# Altium PCB VAMoS PCB RevB.PcbDoc (part 1 of 3)
Units mm, origin at the board's own origin, x right, y up, seen from the top; angles counter-clockwise.
Board outline 96.93 x 94.75 mm, 4 copper layers (Top Signal Layer, Power Plane, Ground Plane, Bottom Signal Layer), stack 1.66 mm thick; 217 components, 103 nets, 623 pads, 255 vias.
Unrouted connection lines stored in the file: 51.
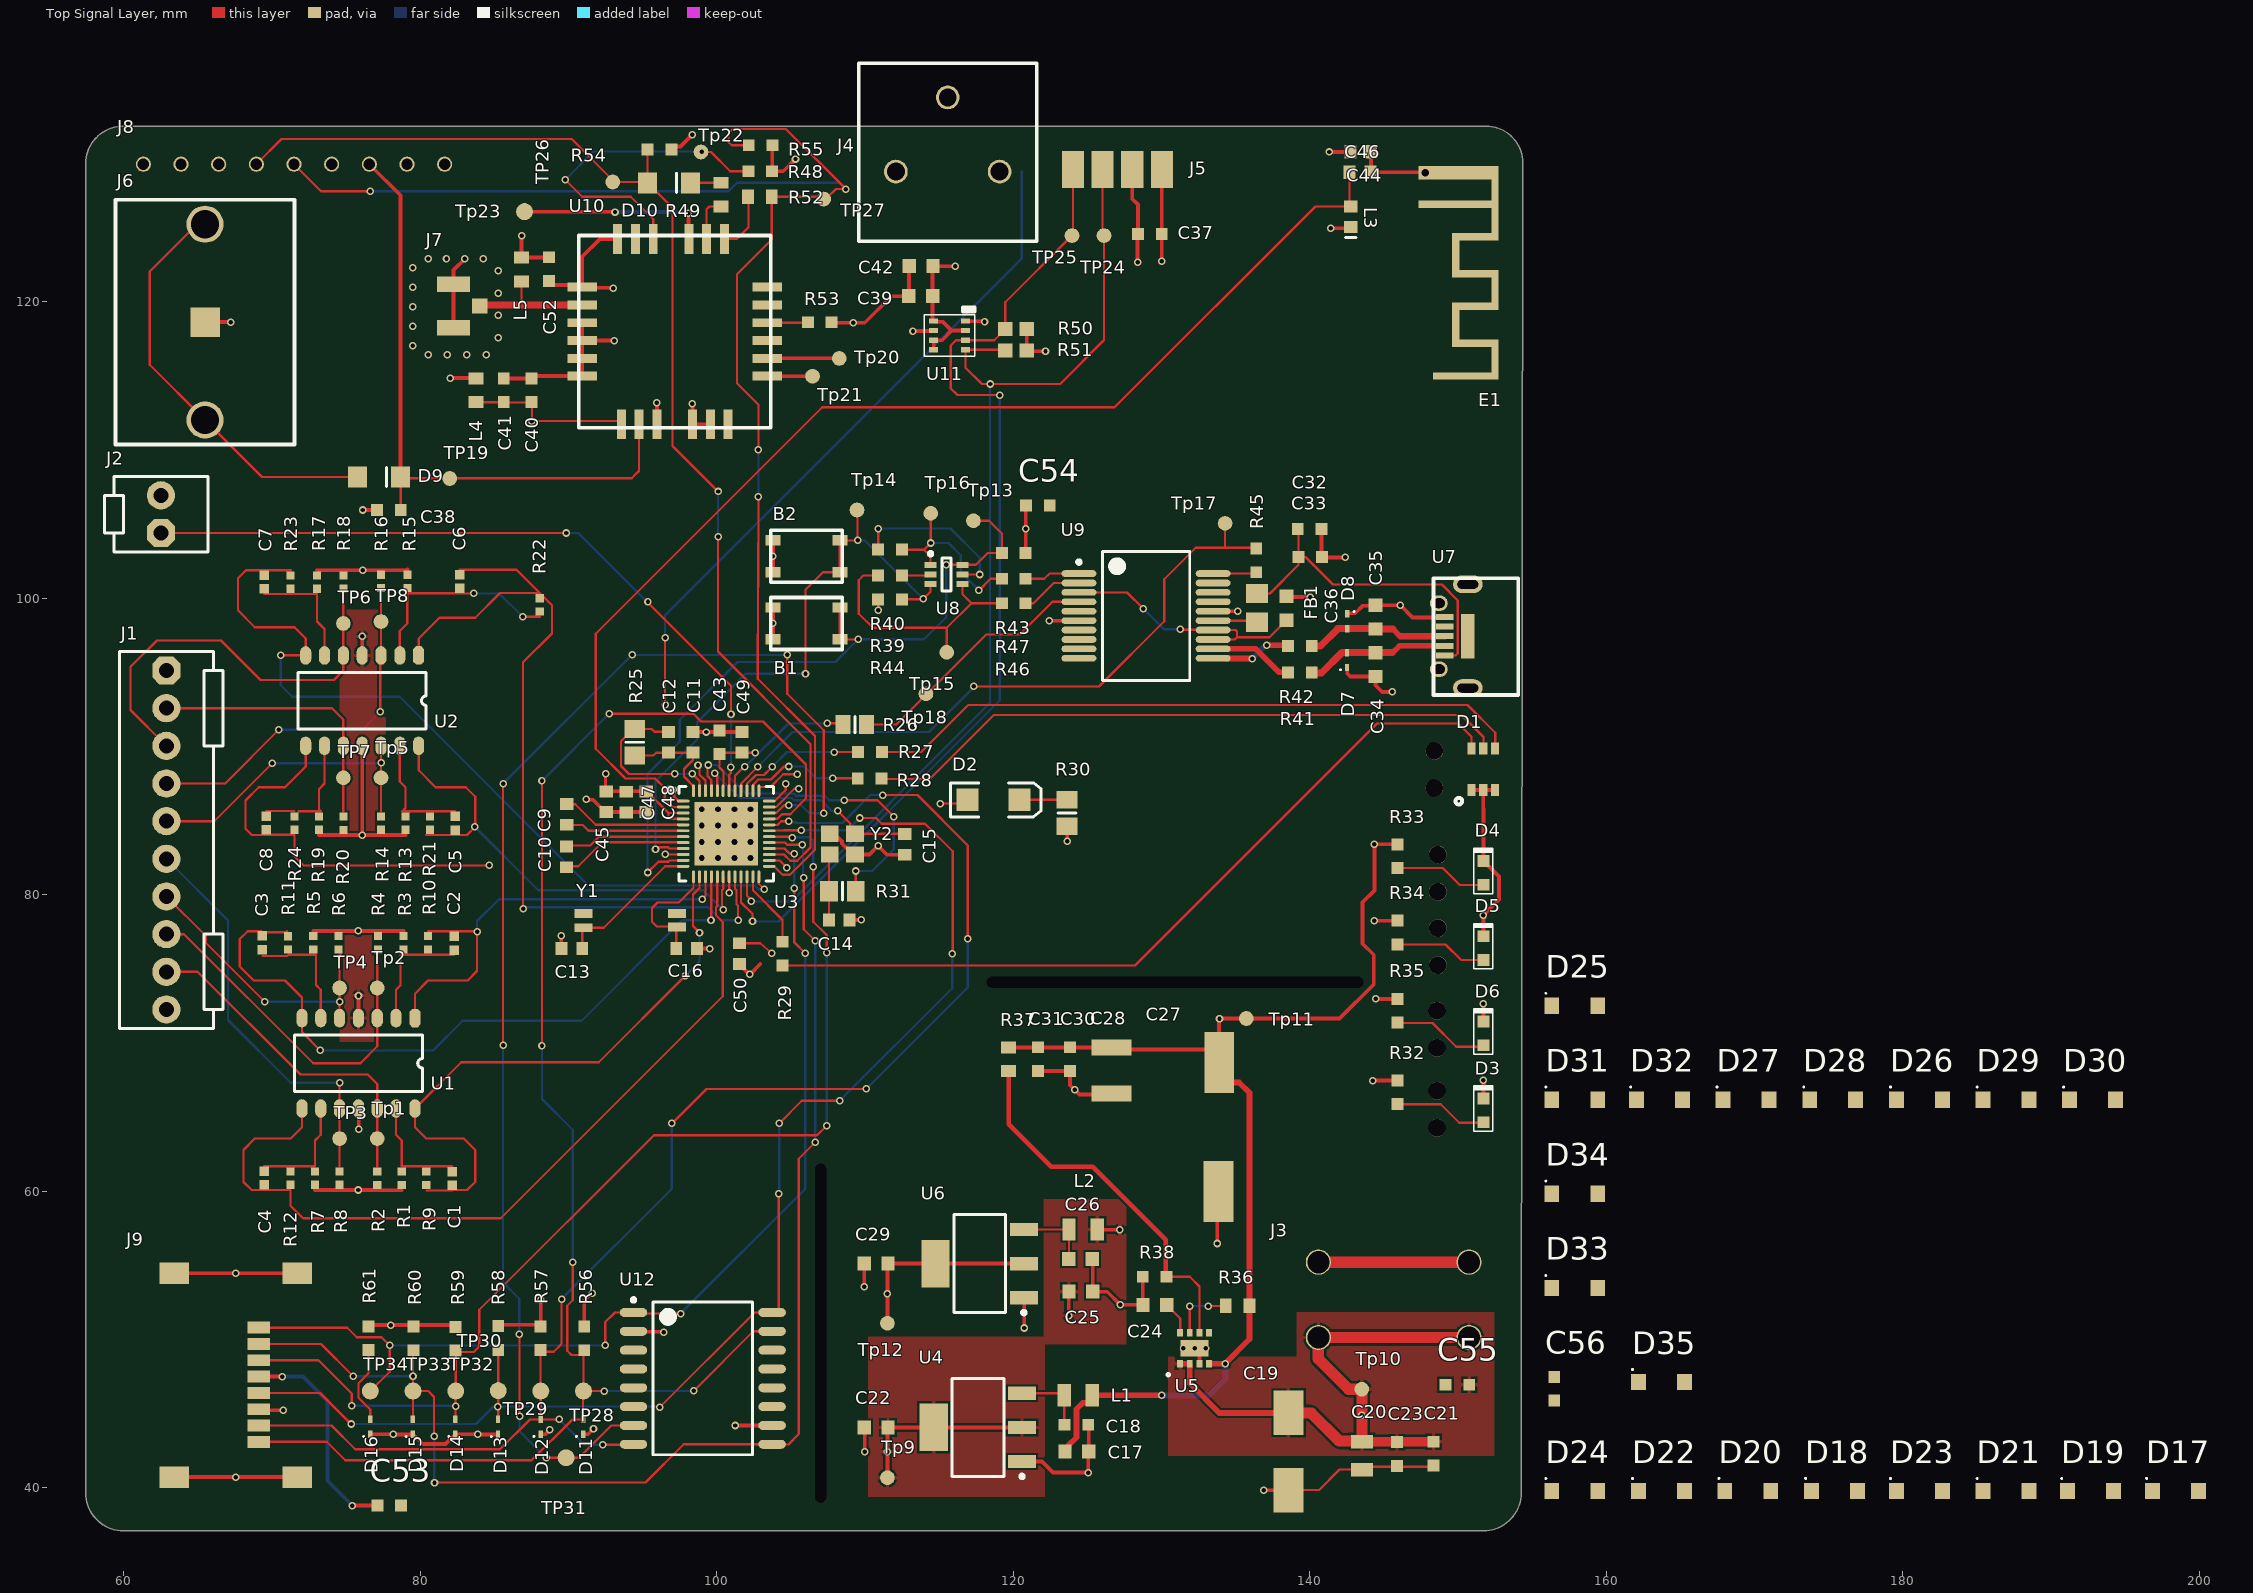
[diagram p0: Top Signal Layer view]
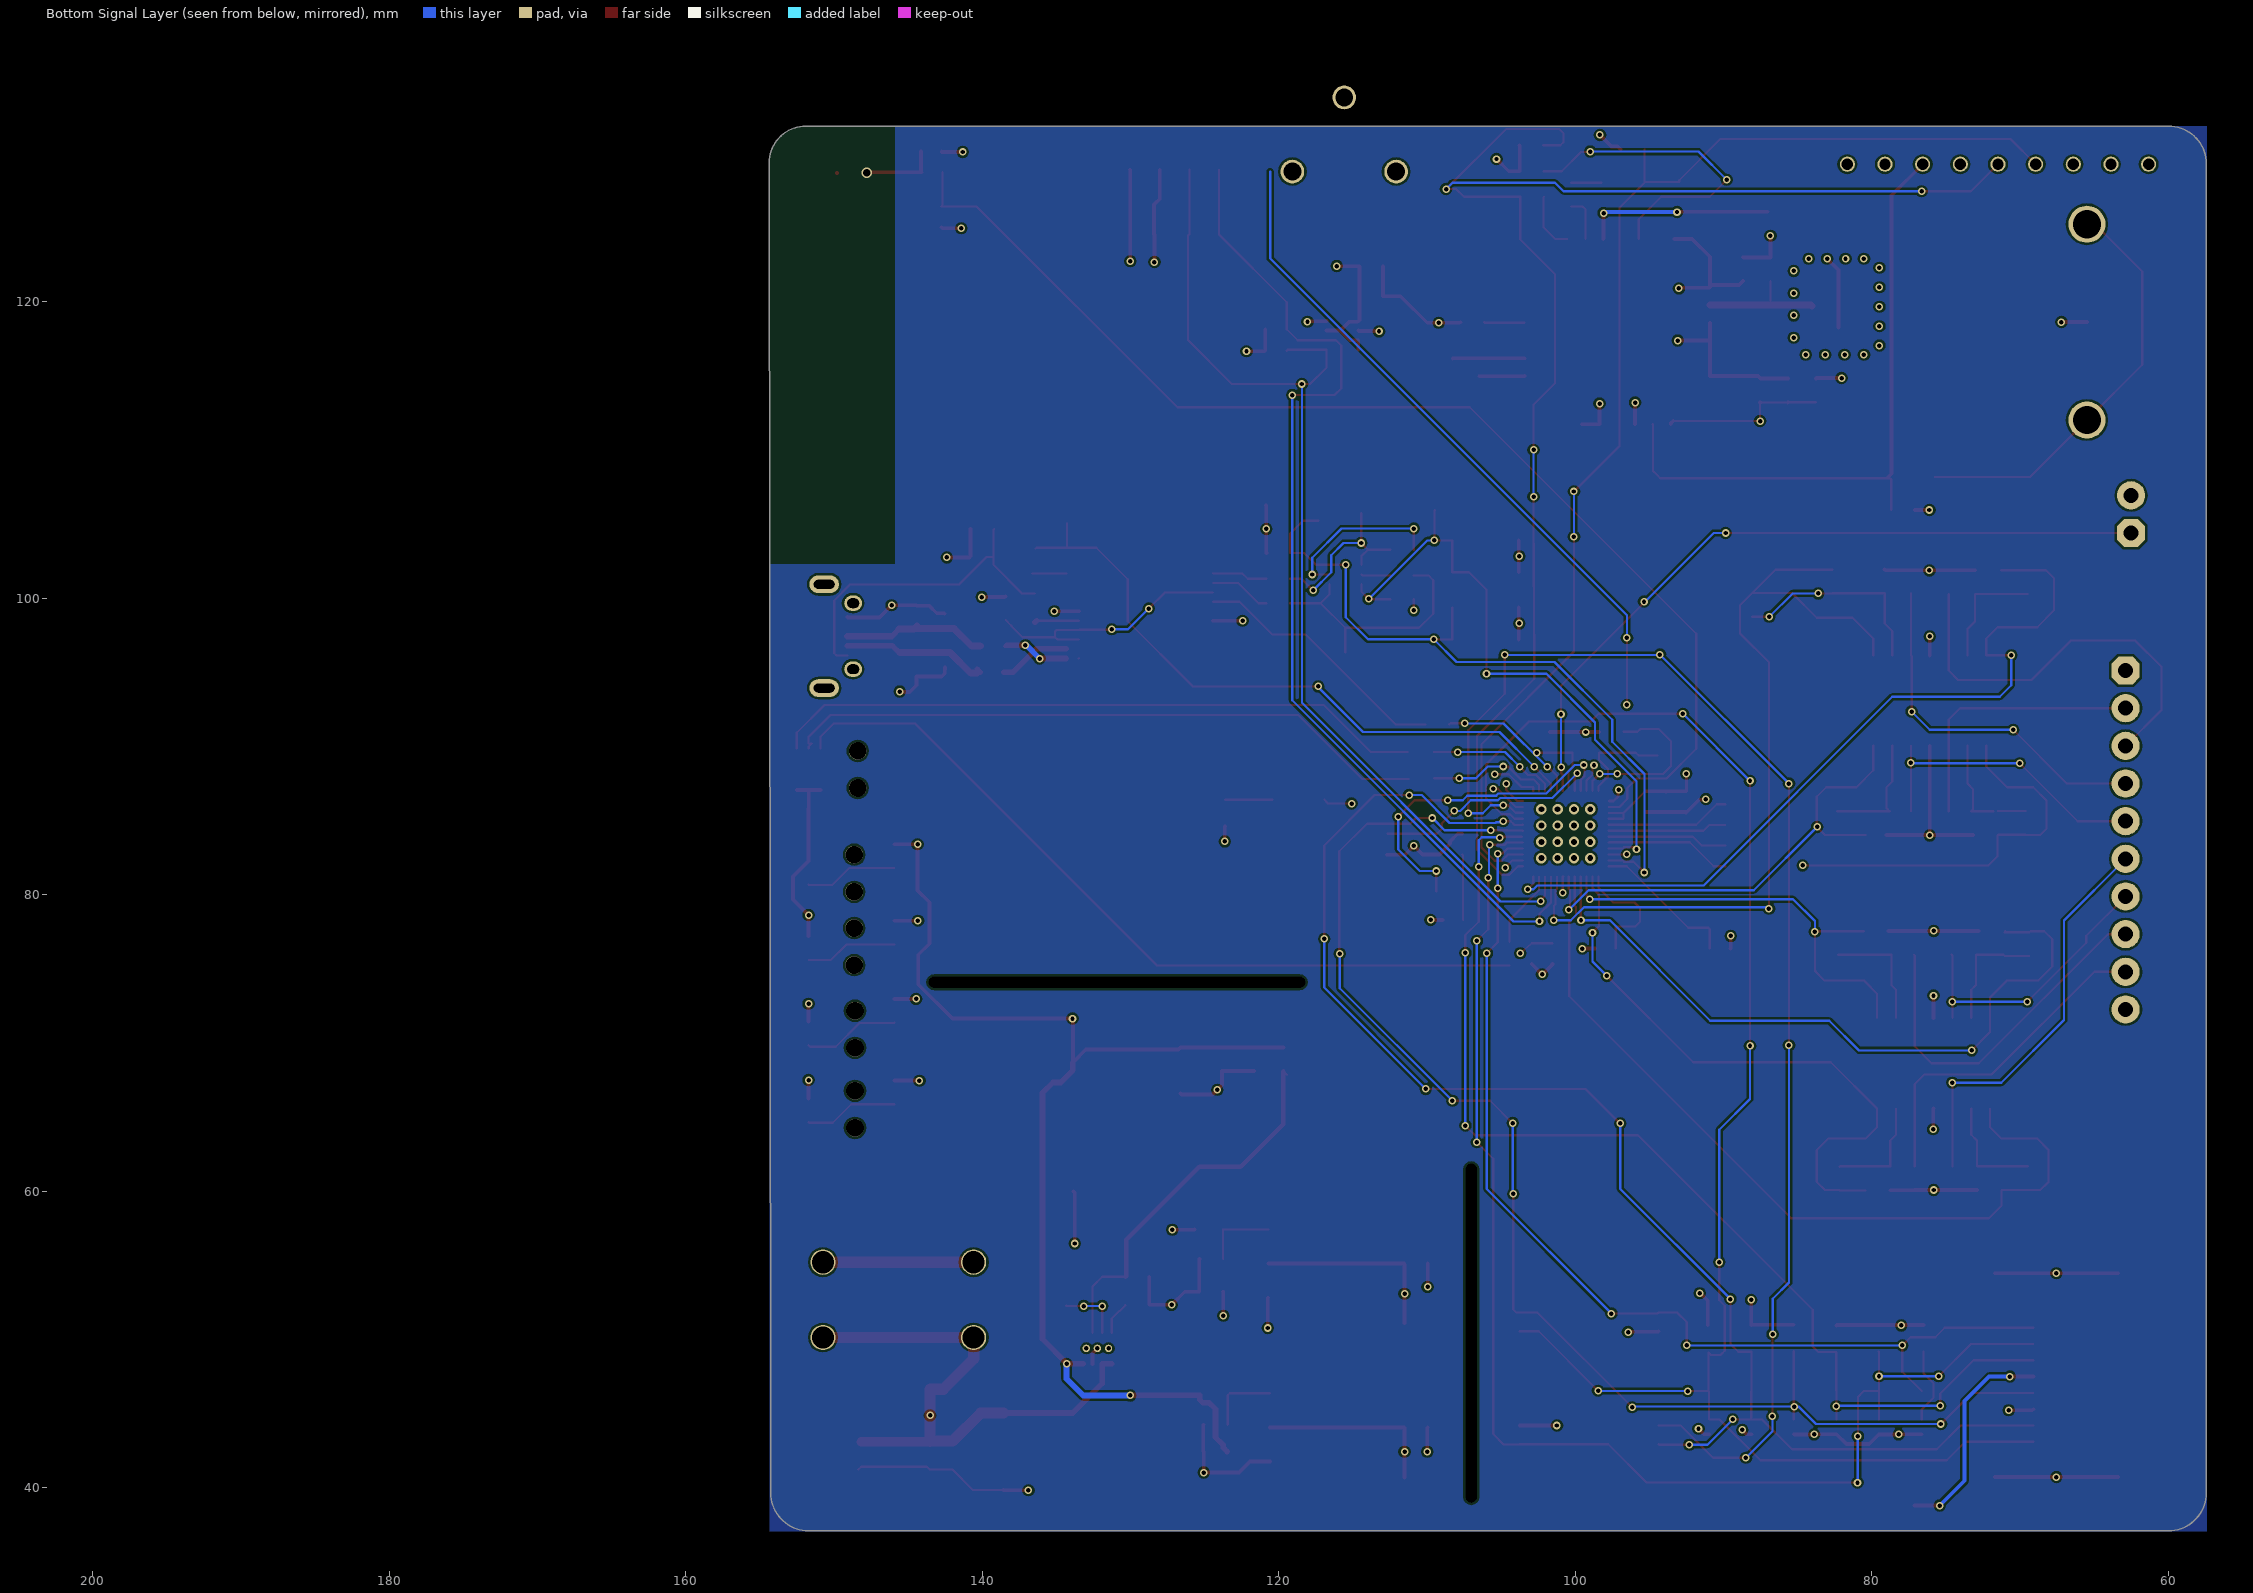
[diagram p1: Bottom Signal Layer view, seen from below]
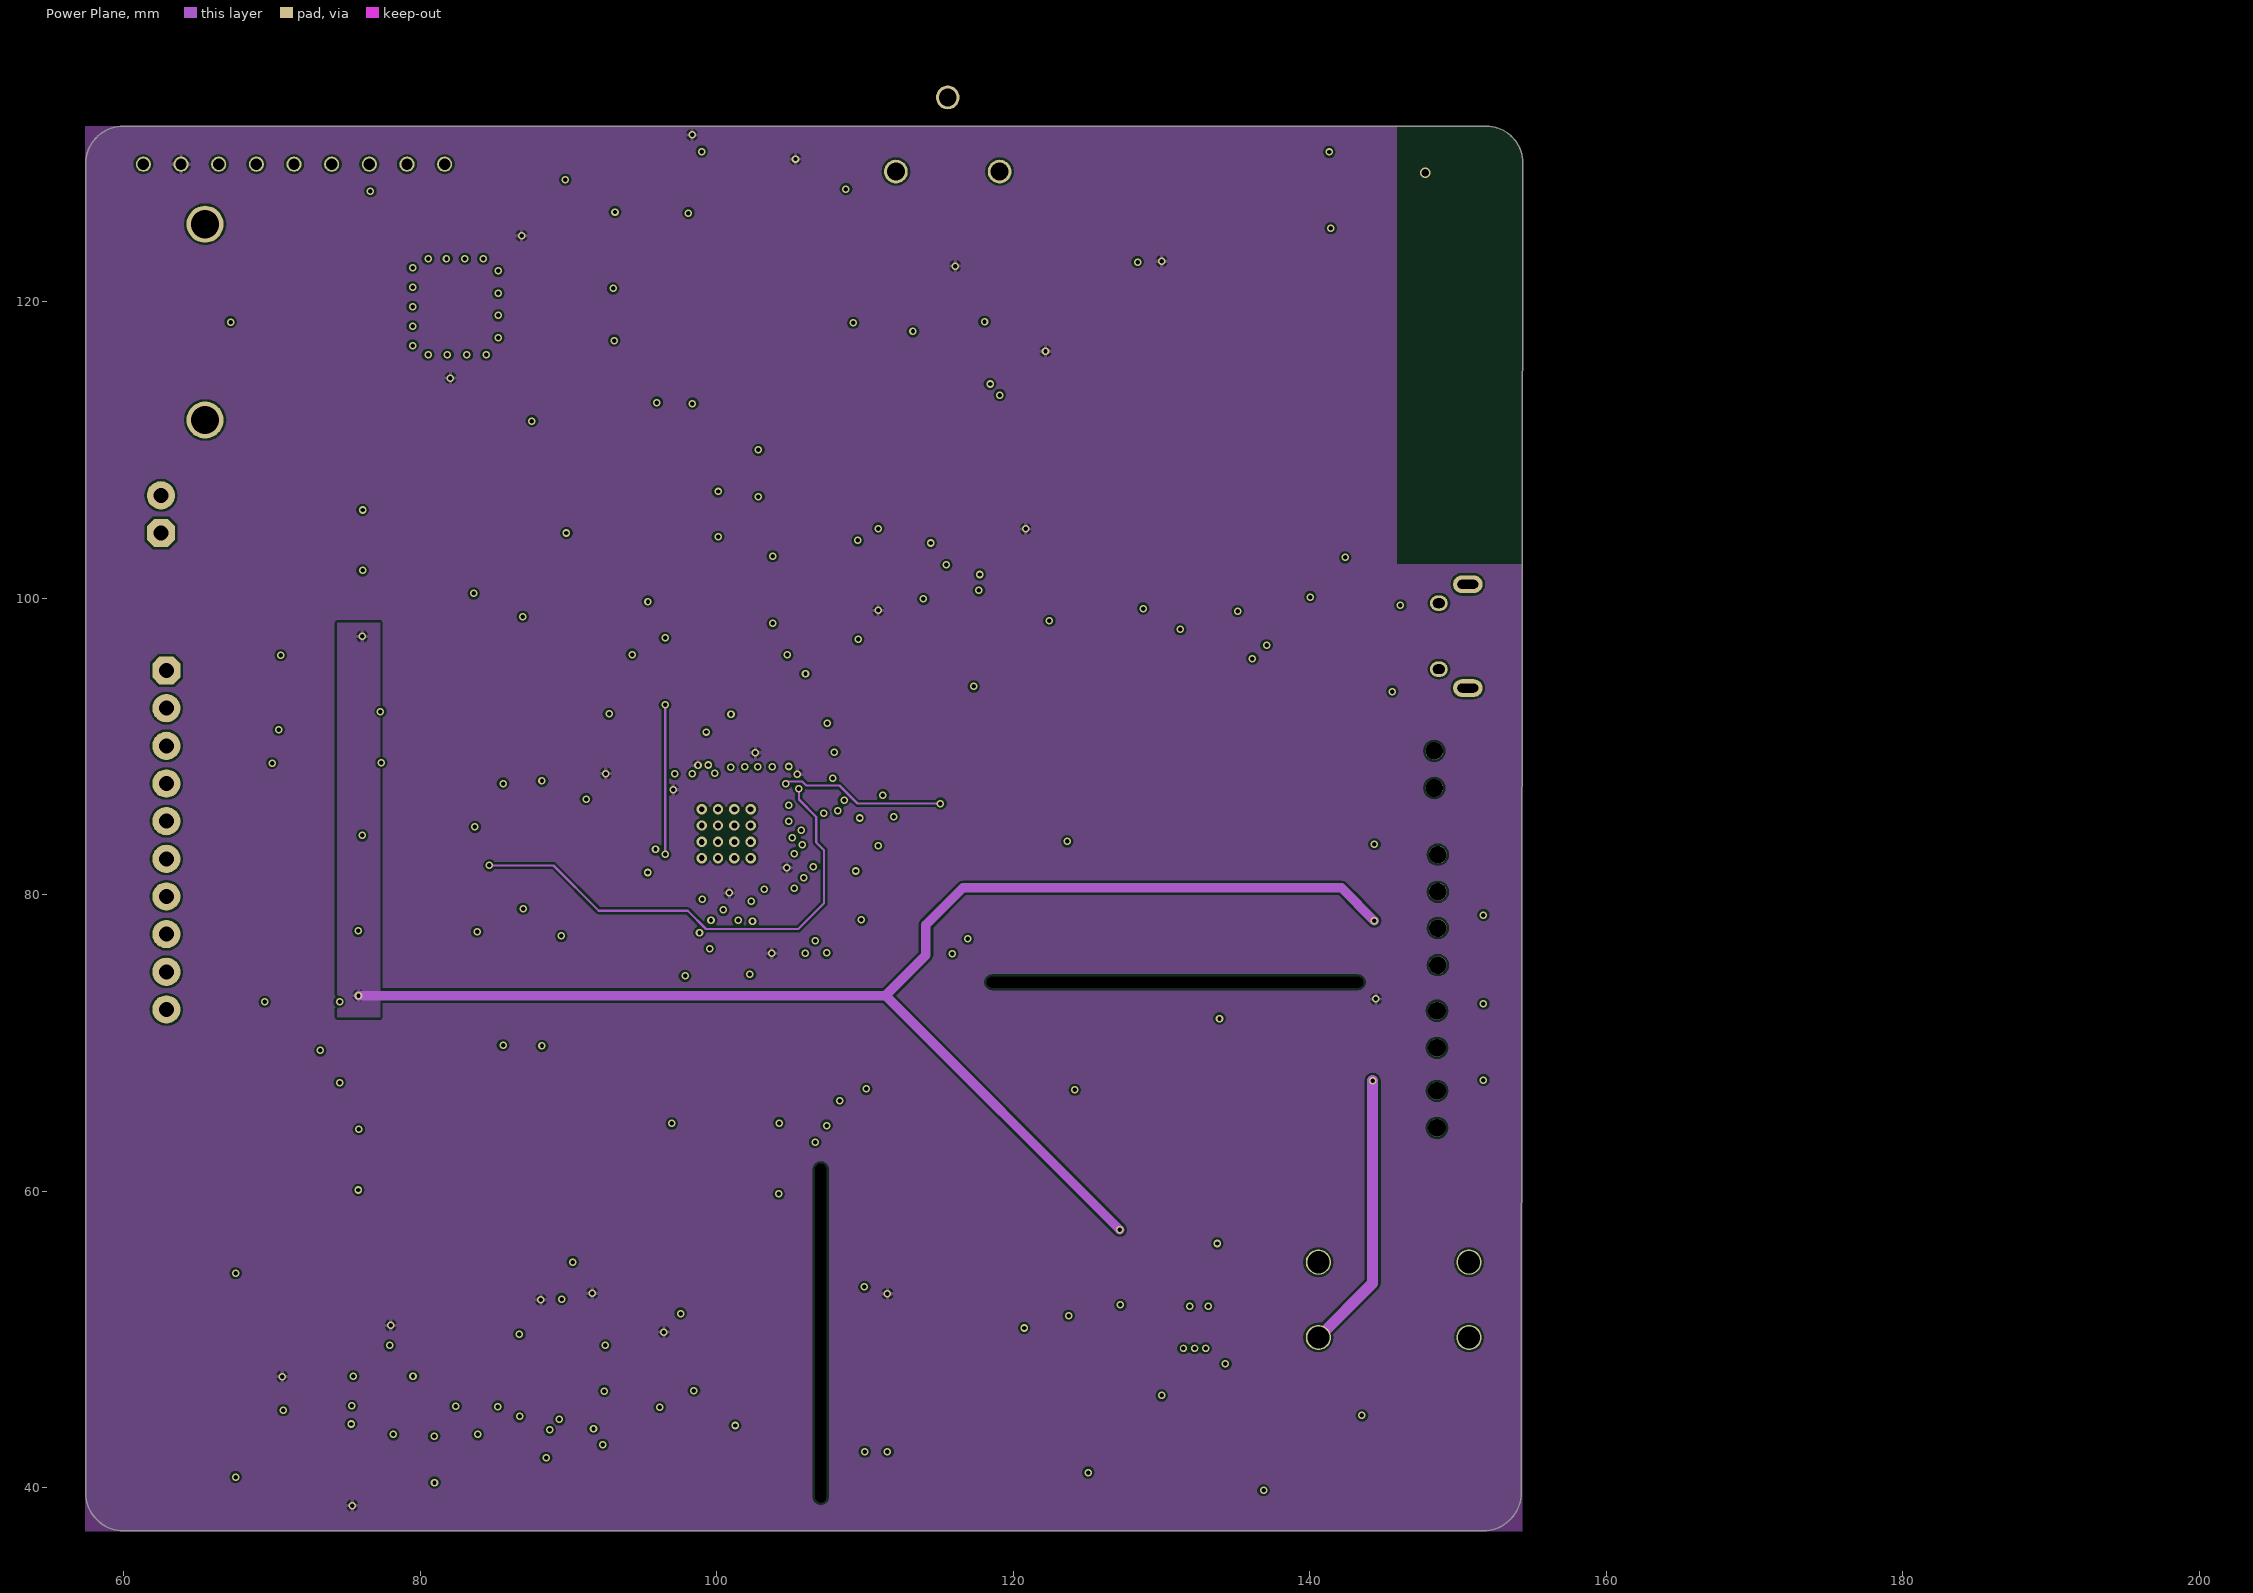
[diagram p2: Power Plane]
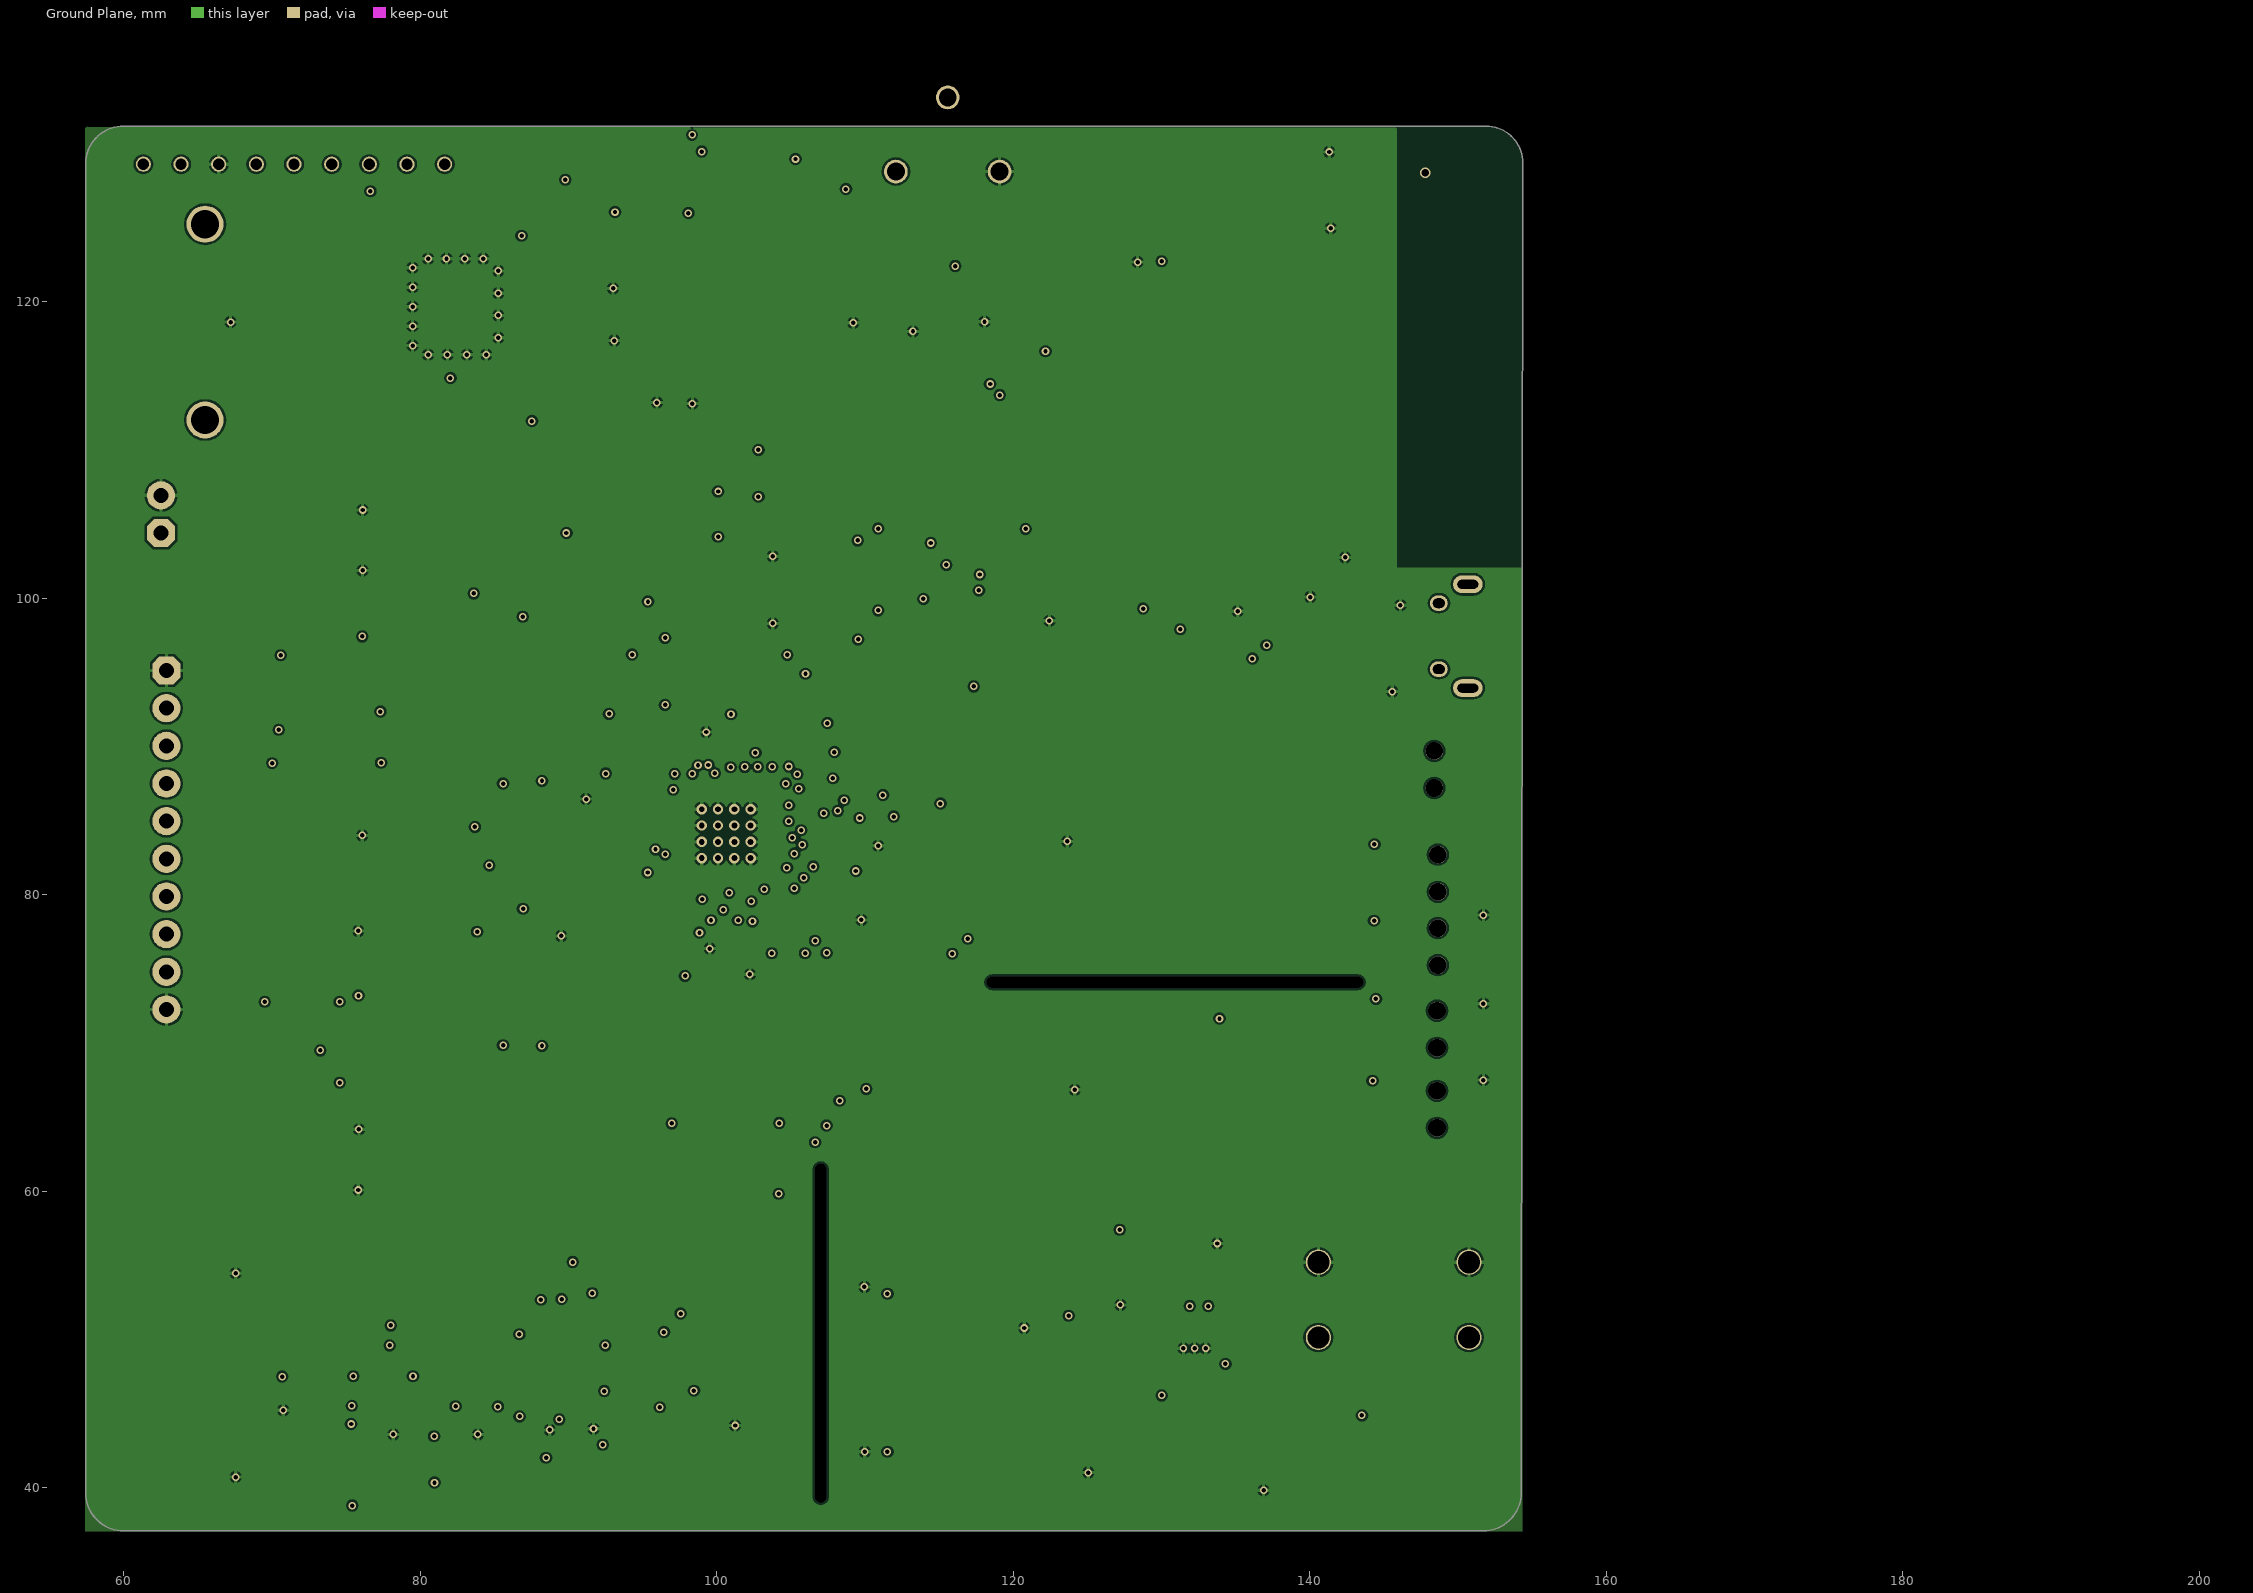
[diagram p3: Ground Plane]
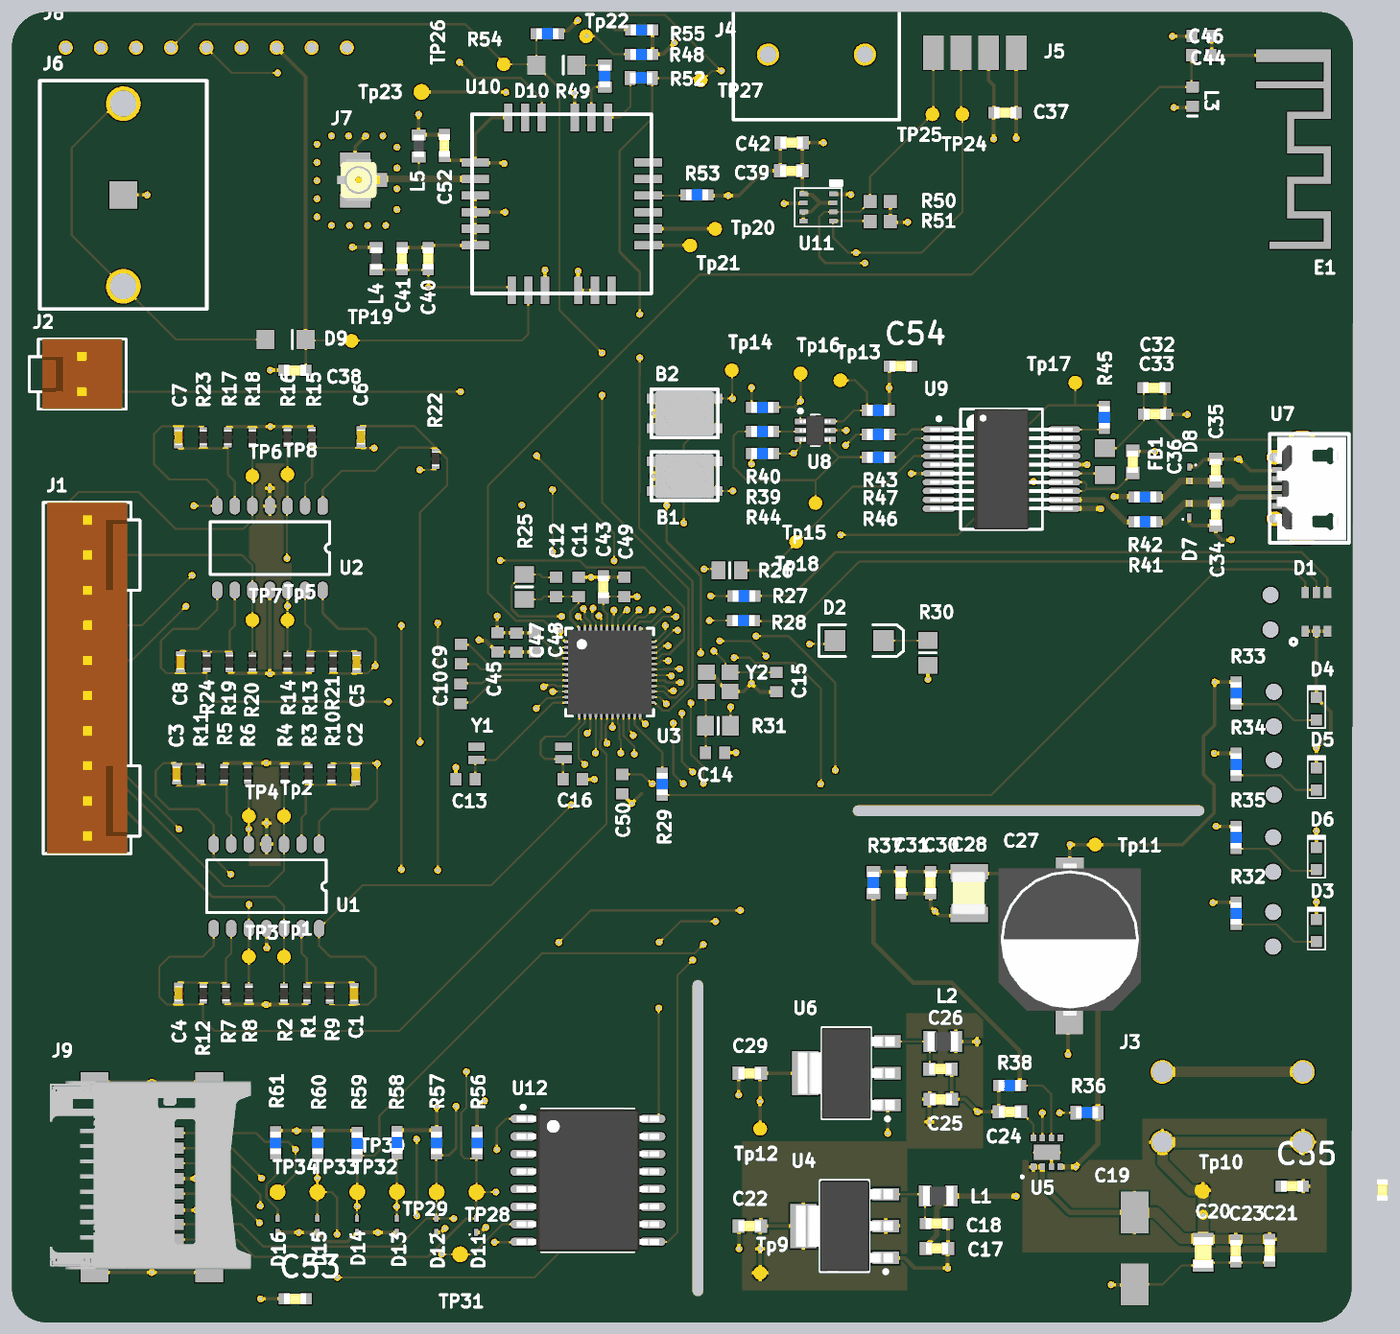
[diagram p5: 3D render of the assembled board from above, using the file's embedded part models]

## Layer stack, top to bottom
Top Solder: solder mask 0.0102, Solder Resist, Dk 3.5
Top Signal Layer: signal copper 0.035
Dielectric 1: prepreg 0.185, PP-006, Dk 4.2
Power Plane: signal copper 0.035
Dielectric 3: core 1.15, Core-009, Dk 4.2
Ground Plane: signal copper 0.035
Dielectric 2: prepreg 0.185, PP-006, Dk 4.2
Bottom Signal Layer: signal copper 0.035
Bottom Solder: solder mask 0.0102, Solder Resist, Dk 3.5

## Board outline
154.25,45.15 154.25,39.64 cw(c151.71,39.64) 151.71,37.1 59.965,37.1 cw(c59.965,39.64) 57.425,39.64 57.425,129.31 cw(c59.965,129.31) 59.965,131.85 151.875,131.85 cw(c151.875,129.375) 154.35,129.375

## Design rules (kind name [scope] priority, off if disabled: settings)
Clearance [All] p1: gap=0.15 ignorepadtopadclearanceinfootprint=FALSE except(0: Arc-Hole Track-Hole SMDPad-Hole THPad-Hole Via-Hole Fill-Hole Poly-Hole Region-Hole Text-Hole)
ComponentClearance [All] p1: gap=0.25 collisioncheckmode=3 verticalgap=0.25 showdistances=FALSE
DiffPairsRouting [All] p1: maxlimit=10 minlimit=0.2 mostfreqgap=0.25 toplayer_minwidth=0.2 toplayer_maxwidth=10 toplayer_prefwidth=0.25 midlayer1_minwidth=0.2 midlayer1_maxwidth=10 midlayer1_prefwidth=0.25 midlayer2_minwidth=0.2 midlayer2_maxwidth=10 midlayer2_prefwidth=0.25 bottomlayer_minwidth=0.2 bottomlayer_maxwidth=10 bottomlayer_prefwidth=0.25 maxuncoupledlength=12.7
Height [All] p1: minheight=0 maxheight=100 prefheight=0
HoleSize [All] p1: absolutevalues=TRUE maxlimit=12 minlimit=0.3 maxpercent=80.000 minpercent=20.000
HoleToHoleClearance [All] p1: gap=0.25 allowstackedmicrovias=TRUE
MinimumSolderMaskSliver [All] p1: minsoldermaskwidth=0.05
PlaneClearance [All] p1: clearance=0.5
PlaneConnect [All] p1: planeconnectstyle=Relief reliefexpansion=0.25 reliefentries=4 reliefconductorwidth=0.25 reliefairgap=0.25
PolygonConnect [All] p1: connectstyle=Relief reliefconductorwidth=0.25 reliefentries=4 polygonreliefangle="90 Angle" airgapwidth=0.15
RoutingCorners [All] p1: cornerstyle=45-Degree minsetback=2.5 maxsetback=2.5
RoutingVias [All] p1: holewidth=0.4 width=0.6 viastyle="Through Hole" minholewidth=0.3 minwidth=0.5 maxholewidth=1 maxwidth=1.5
SilkToSilkClearance [All] p1: silktosilkclearance=0.25
SilkToSolderMaskClearance [IsPad] p1: minsilkscreentomaskgap=0.1 clearancetoexposedcopper=TRUE
SolderMaskExpansion [All] p1: expansion=0.1
Width [All] p1: maxlimit=10 minlimit=0.15 preferedwidth=0.25 minimp=50.000000 maximp=50.000000 favimp=50.000000
19 further rules are at their usual default settings.

## Classes and differential pairs
component class "MCU Auxiliary": C43 C44 C45 C46 C47 C48 C49 C50 C53 C54 C56 D11 D12 D13 D14 D15 D16 D35 E1 J9 L3 R56 R57 R58 R59 R60 R61 TP28 TP29 TP30 TP31 TP32 TP33 TP34 U12
differential pair DIFF90: +DIFF90_P -DIFF90_N

## Components (designator, comment, footprint, x,y, rotation, side; value= is the part's Value field where it differs from the comment)
B1 "Button C&K PTS815 SJG 250 SMTR LFS" "PTS 815" 106.042,98.298 r0 top
B2 "Button C&K PTS815 SJG 250 SMTR LFS" "PTS 815" 106.042,102.825 r0 top
C1 "100nF" CAPC1005X06N 82.15,60.87 r270 top
C2 "100nF" CAPC1005X06N 82.275,76.725 r90 top
C3 "100nF" CAPC1005X06N 69.325,76.763 r90 top
C4 "100nF" CAPC1005X06N 69.469,60.883 r270 top
C5 "100nF" CAPC1005X06N 82.35,84.825 r270 top
C6 "100nF" CAPC1005X06N 82.65,101.125 r90 top
C7 "100nF" CAPC1005X06N 69.469,101.092 r90 top
C8 "100nF" CAPC1005X06N 69.6,84.85 r270 top
C9 "Cap" 1608[0603] 89.875,85.425 r270 top value=270pF
C10 "Cap" 1608[0603] 89.85,82.55 r90 top value=270pF
C11 "Cap" 1608[0603] 98.39,90.285 r270 top value=10n
C12 "Cap" 1608[0603] 96.739,90.285 r270 top value=3n3
C13 "Cap" 1608[0603] 90.212,76.369 r0 top value=18pF
C14 "Cap" 1608[0603] 108.25,78.3 r0 top value=20pF
C15 "Cap" 1608[0603] 112.68,83.393 r270 top value=20pF
C16 "Cap" 1608[0603] 97.959,76.369 r180 top value=18pF
C17 "4.7uF" C1608[0603] 124.275,42.45 r180 top
C18 "4.7uF" "C1608[0603] small" 124.25,44.25 r180 top
C19 "22uF" "Radial Can F61 6.6x6.6" 138.557,42.545 r180 top
C20 "22uF" C2012[0805] 143.51,42.164 r90 top
C21 "100nF" "C1608[0603] small" 148.325,42.3 r90 top
C22 "4.7uF" C1608[0603] 110.744,44.069 r0 top
C23 "15nF" "C1608[0603] small" 145.875,42.275 r90 top
C24 "3.3nF" C1608[0603] 129.54,52.324 r0 top
C25 "4.7uF" C1608[0603] 124.55,53.225 r180 top value=4u7
C26 "4.7uF" C1608[0603] 124.525,55.425 r180 top value=4u7
C27 "100uF 50V Hybrid Polymer Bulk Smoothing" "Radial Can Size G" 133.854,64.337 r180 top
C28 "100uF" C3225[1210]_Tall 126.615,68.147 r90 top
C29 "4.7uF" C1608[0603] 110.744,55.118 r0 top value=4u7
C30 "100nF" "C1608[0603] small" 123.821,68.909 r90 top
C31 "15nF" "C1608[0603] small" 121.662,68.909 r90 top
C32 "4.7uF" "C1608[0603] small" 139.975,104.675 r180 top
C33 "100nF" "C1608[0603] small" 140.025,102.775 r180 top
C34 "47pF" C1608[0603] 144.425,95.525 r90 top
C35 "47pF" C1608[0603] 144.425,98.725 r270 top
C36 "100pF" C1608[0603] 138.425,99.325 r270 top
C37 "1uF" "C1608[0603] small" 129.2,124.575 r0 top
C38 "1uF" "C1608[0603] small" 77.875,105.95 r0 top
C39 "100pF" C1608[0603] 113.75,120.375 r0 top
C40 "1uF" "C1608[0603] small" 87.5,114.025 r270 top
C41 "100nF" "C1608[0603] small" 85.625,114.025 r270 top
C42 "100pF" C1608[0603] 113.775,122.4 r0 top
C43 "100nF" "C1608[0603] small" 100.168,90.285 r270 top
C44 "Cap" 1608[0603] 143.425,130.125 r180 top value=2.4pF
C45 "Cap" 1608[0603] 92.525,86.275 r90 top value=100n
C46 "Cap" 1608[0603] 143.375,128.725 r0 top value=5.6pF
C47 "Cap" 1608[0603] 93.875,86.25 r90 top value=100n
C48 "Cap" 1608[0603] 95.225,86.275 r90 top value=10u
C49 "Cap" 1608[0603] 101.692,90.285 r270 top value=100n
C50 "Cap" 1608[0603] 101.524,76.026 r90 top value=100n
C52 "1uF" "C1608[0603] small" 88.675,122.2 r90 top
C53 "100nF" "C1608[0603] small" 77.9,38.8 r180 top value=100n
C54 "100nF" "C1608[0603] small" 121.65,106.25 r180 top value=100n
C55 "1uF" "C1608[0603] small" 149.95,46.95 r0 top
C56 "100nF" "C1608[0603] small" 156.483,46.677 r90 top
D1 "VLMRGB6112" VLMRGB6112 151.692,88.47 r270 top
D2 "LED2" 3.2X1.6X1.1 118.66,86.402 r0 top
D3 "LED Green" LED_0603 151.7,65.45 r90 top
D4 "LED Green" LED_0603 151.7,81.475 r90 top
D5 "LED Green" LED_0603 151.7,76.4 r90 top
D6 "LED Green" LED_0603 151.7,70.65 r90 top
D7 "ESD7951ST5GOSCT-ND" SODFL100X40-2N 142.5,95.825 r90 top
D8 "ESD7951ST5GOSCT-ND" SODFL100X40-2N 142.525,98.45 r270 top
D9 "1N4148W-FDICT-ND" SOD-123FL_TVS 77.2,108.175 r0 top
D10 "1N4148W-FDICT-ND" SOD-123FL_TVS 96.774,128.016 r0 top
D11 "ESD7951ST5GOSCT-ND" SODFL100X40-2N 90.975,44.111 r90 top
D12 "ESD7951ST5GOSCT-ND" SODFL100X40-2N 88.105,44.111 r90 top
D13 "ESD7951ST5GOSCT-ND" SODFL100X40-2N 85.234,44.111 r90 top
D14 "ESD7951ST5GOSCT-ND" SODFL100X40-2N 82.364,44.111 r90 top
D15 "ESD7951ST5GOSCT-ND" SODFL100X40-2N 79.493,44.111 r90 top
D16 "ESD7951ST5GOSCT-ND" SODFL100X40-2N 76.623,44.111 r90 top
D17 "5V TVS" "NXP PTVSxS1UR-Series (SOD123W)" 198.385,39.777 r0 top
D18 "5V TVS" "NXP PTVSxS1UR-Series (SOD123W)" 175.384,39.777 r0 top
D19 "5V TVS" "NXP PTVSxS1UR-Series (SOD123W)" 192.659,39.777 r0 top
D20 "5V TVS" "NXP PTVSxS1UR-Series (SOD123W)" 169.533,39.777 r0 top
D21 "5V TVS" "NXP PTVSxS1UR-Series (SOD123W)" 186.959,39.777 r0 top
D22 "5V TVS" "NXP PTVSxS1UR-Series (SOD123W)" 163.708,39.777 r0 top
D23 "5V TVS" "NXP PTVSxS1UR-Series (SOD123W)" 181.109,39.777 r0 top
D24 "5V TVS" "NXP PTVSxS1UR-Series (SOD123W)" 157.858,39.777 r0 top
D25 "5V TVS" "NXP PTVSxS1UR-Series (SOD123W)" 157.858,72.504 r0 top
D26 "3.3V TVS" "NXP PTVSxS1UR-Series (SOD123W)" 181.109,66.178 r0 top
D27 "3.3V TVS" "NXP PTVSxS1UR-Series (SOD123W)" 169.408,66.178 r0 top
D28 "3.3V TVS" "NXP PTVSxS1UR-Series (SOD123W)" 175.259,66.178 r0 top
D29 "3.3V TVS" "NXP PTVSxS1UR-Series (SOD123W)" 186.959,66.178 r0 top
D30 "3.3V TVS" "NXP PTVSxS1UR-Series (SOD123W)" 192.784,66.178 r0 top
D31 "3.3V TVS" "NXP PTVSxS1UR-Series (SOD123W)" 157.858,66.178 r0 top
D32 "3.3V TVS" "NXP PTVSxS1UR-Series (SOD123W)" 163.583,66.178 r0 top
D33 "3.3V TVS" "NXP PTVSxS1UR-Series (SOD123W)" 157.858,53.478 r0 top
D34 "12V TVS" "NXP PTVSxS1UR-Series (SOD123W)" 157.858,59.828 r0 top
D35 "3.3V TVS" "NXP PTVSxS1UR-Series (SOD123W)" 163.708,47.127 r0 top
E1 "Antenna" SWRA1117 149.783,128.688 r270 top
FB1 "Ferrite Bead" MI0805K400R-10 136.425,100.325 r180 top
J1 "Analog Inputs" 6410/10pin 62.865,95.123 r270 top
J2 "To Pump" 6410/2pin 62.5,104.4 r90 top
J3 "1790283" "5.08mm 2pos TermBlock" 145.65,52.675 r270 top
J4 "1985205" "3POS PHOENIX" 115.57,128.778 r0 top
J5 "Four Terminal Small" "Solder Small 4 Pos" 127.016,128.905 r180 top
J6 "Keystone 2997" "2997 11.6MM COIN CELL" 65.475,118.625 r90 top
J7 "uFL Connector" CONUFL001-SMD-T 82.481,119.711 r90 top
J8 "PPPC091LFBN-RC" "0.100\" 9PIN" 71.475,129.275 r180 top
J9 "472192001" SD-47219-001 69.088,47.498 r90 top
L1 "MH2029" L2012[0805] 124.372,46.244 r180 top
L2 "MH2029" L2012[0805] 124.702,57.416 r180 top
L3 "Inductor" INDC1608L 142.748,125.73 r90 top value=2.7nH
L4 "600Ohm @ 100MHz" L1608[0603] 83.75,114.025 r270 top
L5 "33nH" L1608[0603] 86.825,122.175 r90 top
R1 "1K0" RESC1005X03N 78.74,60.87 r90 top value=1k
R2 "4R99" RESC1005X03N 77.089,60.87 r90 top
R3 "1K0" RESC1005X03N 78.867,76.758 r270 top value=1k
R4 "4R99" RESC1005X03N 77.141,76.758 r270 top
R5 "1K0" RESC1005X03N 72.771,76.758 r270 top value=1k
R6 "4R99" RESC1005X03N 74.474,76.758 r270 top
R7 "1K0" RESC1005X03N 72.898,60.883 r90 top value=1k
R8 "4R99" RESC1005X03N 74.549,60.883 r90 top
R9 "22K" RESC1005X03N 80.391,60.87 r270 top
R10 "22K" RESC1005X03N 80.518,76.758 r90 top
R11 "22K" RESC1005X03N 71.075,76.75 r90 top
R12 "22K" RESC1005X03N 71.247,60.883 r270 top
R13 "1K0" RESC1005X03N 78.994,84.836 r90 top value=1k
R14 "4R99" RESC1005X03N 77.343,84.836 r90 top
R15 "1K0" RESC1005X03N 79.121,101.13 r270 top value=1k
R16 "4R99" RESC1005X03N 77.343,101.13 r270 top
R17 "1K0" RESC1005X03N 73.025,101.092 r270 top value=1k
R18 "4R99" RESC1005X03N 74.803,101.092 r270 top
R19 "1K0" RESC1005X03N 73.152,84.836 r90 top value=1k
R20 "4R99" RESC1005X03N 74.803,84.823 r90 top
R21 "22K" RESC1005X03N 80.645,84.836 r270 top
R22 "22K" RESC1005X03N 88.05,99.55 r90 top
R23 "22K" RESC1005X03N 71.247,101.092 r90 top
R24 "22K" RESC1005X03N 71.501,84.836 r270 top
R25 "20K" 6-0805_N 94.453,90.285 r90 top
R26 "499R" 6-0805_L 109.3,91.475 r0 top
R27 "165R" "R1608[0603] small" 110.325,89.625 r0 top
R28 "165R" "R1608[0603] small" 110.3,87.85 r0 top
R29 "165R" "R1608[0603] small" 104.425,76.025 r270 top
R30 "330R" 6-0805_N 123.613,85.513 r90 top
R31 "0R" 6-0805_N 108.461,80.241 r180 top
R32 "1.2K" "R1608[0603] small" 145.9,66.675 r90 top
R33 "560" "R1608[0603] small" 145.9,82.6 r90 top
R34 "560" "R1608[0603] small" 145.9,77.45 r90 top
R35 "330" "R1608[0603] small" 145.9,72.175 r90 top
R36 "100K" R1608[0603] 135.125,52.275 r0 top
R37 "71K5" R1608[0603] 119.675,68.9 r90 top
R38 "10K" "R1608[0603] small" 129.527,54.229 r0 top
R39 "1K0" "R1608[0603] small" 111.675,101.525 r0 top
R40 "1K0" "R1608[0603] small" 111.675,103.275 r0 top
R41 "27R" "R1608[0603] small" 139.319,94.996 r0 top
R42 "27R" "R1608[0603] small" 139.319,96.774 r0 top
R43 "10K" "R1608[0603] small" 120.022,103.05 r0 top
R44 "10K" "R1608[0603] small" 111.675,99.925 r180 top
R45 "1K0" "R1608[0603] small" 136.375,102.55 r270 top
R46 "1K0" "R1608[0603] small" 120.022,99.659 r0 top
R47 "1K0" "R1608[0603] small" 120.022,101.31 r0 top
R48 "10K" "R1608[0603] small" 102.925,128.8 r0 top
R49 "470" R1608[0603] 100.275,127.225 r90 top
R50 "4.7K Resistor 0603" "0603 Resistor" 120.175,118.15 r0 top value=4k7
R51 "4.7K Resistor 0603" "0603 Resistor" 120.174,116.701 r0 top value=4k7
R52 "470" R1608[0603] 102.9,127.075 r0 top
R53 "10K" "R1608[0603] small" 106.934,118.618 r180 top
R54 "10K" "R1608[0603] small" 96.125,130.275 r0 top
R55 "10K" "R1608[0603] small" 102.95,130.55 r0 top
R56 "10K" "R1608[0603] small" 91.05,50.075 r90 top value=10k
R57 "10K" "R1608[0603] small" 88.1,50.08 r90 top value=10k
R58 "10K" "R1608[0603] small" 85.25,50.1 r90 top value=10k
R59 "10K" "R1608[0603] small" 82.375,50.05 r90 top value=10k
R60 "10K" "R1608[0603] small" 79.525,50.075 r90 top value=10k
R61 "10K" "R1608[0603] small" 76.496,50.08 r90 top value=10k
Tp1 "PAD" TP_SMD_39MIL 77.089,63.55 r0 top (schematic designator TP1)
Tp2 "PAD" TP_SMD_39MIL 77.089,73.71 r0 top (schematic designator TP2)
TP3 "PAD" TP_SMD_39MIL 74.549,63.55 r0 top
TP4 "PAD" TP_SMD_39MIL 74.549,73.71 r0 top
Tp5 "PAD" TP_SMD_39MIL 77.343,87.884 r0 top (schematic designator TP5)
TP6 "PAD" TP_SMD_39MIL 74.803,98.298 r0 top
TP7 "PAD" TP_SMD_39MIL 74.803,87.884 r0 top
TP8 "PAD" TP_SMD_39MIL 77.343,98.425 r0 top
Tp9 "PAD" TP_SMD_39MIL 111.5,40.675 r270 top (schematic designator TP9)
Tp10 "PAD" TP_SMD_39MIL 143.5,46.65 r180 top (schematic designator TP10)
Tp11 "PAD" TP_SMD_39MIL 135.708,71.65 r180 top (schematic designator TP11)
Tp12 "PAD" TP_SMD_39MIL 111.5,51.1 r270 top (schematic designator TP12)
Tp13 "PAD" TP_SMD_39MIL 117.3,105.225 r90 top (schematic designator TP13)
Tp14 "PAD" TP_SMD_39MIL 109.45,105.95 r90 top (schematic designator TP14)
Tp15 "PAD" TP_SMD_39MIL 115.5,96.35 r90 top (schematic designator TP15)
Tp16 "PAD" TP_SMD_39MIL 114.425,105.725 r90 top (schematic designator TP16)
Tp17 "PAD" TP_SMD_39MIL 134.275,105.05 r90 top (schematic designator TP17)
Tp18 "PAD" TP_SMD_39MIL 114.1,93.55 r90 top (schematic designator TP18)
TP19 "PAD" TP_SMD_39MIL 81.975,108.075 r90 top
Tp20 "PAD" TP_SMD_39MIL 108.25,116.175 r90 top
Tp21 "PAD" TP_SMD_39MIL 106.45,114.975 r90 top
Tp22 "PAD" TP_SMD_39MIL 98.925,130.1 r90 top
Tp23 "PAD" TP_SMD_45MIL 87.025,126.075 r90 top
TP24 "PAD" TP_SMD_39MIL 126.111,124.46 r90 top
TP25 "PAD" TP_SMD_39MIL 123.952,124.46 r90 top
TP26 "PAD" TP_SMD_39MIL 92.975,128.075 r90 top
TP27 "PAD" TP_SMD_39MIL 107.2,126.925 r90 top
TP28 "PAD" TP_SMD_45MIL 91,46.524 r90 top locked
TP29 "PAD" TP_SMD_45MIL 88.12,46.524 r90 top locked
TP30 "PAD" TP_SMD_45MIL 85.25,46.55 r90 top
TP31 "PAD" TP_SMD_45MIL 89.825,42.025 r90 top
TP32 "PAD" TP_SMD_45MIL 82.385,46.524 r90 top locked
TP33 "PAD" TP_SMD_45MIL 79.503,46.524 r90 top locked
TP34 "PAD" TP_SMD_45MIL 76.623,46.524 r90 top locked
U1 "LM660" SOIC-14 75.692,68.63 r270 top
U2 "LM660" SOIC-14 75.946,93.091 r270 top
U3 "ESP32D0WDQ6" QFN40P600X600X90_HS-49N 100.626,84.116 r0 top
U4 "ZLDO1117G50TA" SOT230P700X165-4N 117.602,44.069 r180 top
U5 "TPS82140" SIL0008D 132.219,49.403 r90 top
U6 "ZLDO1117QG33TA" SOT230P700X165-4N 117.729,55.118 r180 top
U7 "UJ2-MIBH2-4" UJ2-MIBH2-4-SMT 149.098,96.139 r180 top
U8 "MBT3904DW1T1G" SOT65P210X110-6N 115.482,101.6 r0 top
U9 "FT231XS" SOP64P1030X175-20N 128.944,98.806 r0 top
U10 "XA1100" XA1100 97.155,117.983 r0 top
U11 "BME280" BME280 115.697,117.729 r0 top
U12 "S25FL128S" SOIC127P1030X265-16N 99.05,47.375 r0 top
Y1 "MC-146 32.768KA-AC3" MC-146 94.149,78.274 r0 top
Y2 "FA-20H" FA-20H 108.461,83.416 r0 top

## Footprints (in the part's own frame and the unit in brackets; to place one, negate y for a bottom-side part, rotate by r counter-clockwise, add the part's x,y. Pads: shape width x height; smd on the part's side, far side on the other; paste and mask are expansions set on the pad)
"0.100\" 9PIN" [mm] "0.100\" FEMALE HEADER 9PIN"
  round 1.02 hole 0.762: 1(-10.16,0) 2(-7.62,0) 3(-5.08,0) 4(-2.54,0) 5(0,0) 6(2.54,0) 7(5.08,0) 8(7.62,0) 9(10.16,0)
  body extent -12,-1.25 12,1.25, height 8.5
3.2X1.6X1.1 [mm] "SMT LED; 2 Flat Leads"
  rect 1.5x1.5 smd: 1(-1.75,0) 2(1.75,0)
  silkscreen extent -2.9,-1.15 3.2,1.15
"3POS PHOENIX" [mm] "3POS,THD,TENSION CLAMP,PHOENIX CONTACT"
  round 1.6 hole 1.2: 1(-3.5,0) 2(0,5) 3(3.5,0)
  silkscreen extent -6,-4.7 6,7.3, body extent -5.97,-4.67 5.97,7.39, height 13.1
"5.08mm 2pos TermBlock" [mm]
  round 1.7 hole 1.5: 1(-2.54,5.08) 1(-2.54,-5.08) 2(2.54,5.08) 2(2.54,-5.08)
  body extent -3.56,-8.51 3.74,7.69, height 12.8
6-0805_L [mm] "Chip Resistor, Body 2.0x1.2mm, IPC High Density"
  rect 1x1.3 smd: 1(-0.8,0) 2(0.8,0)
  silkscreen extent 0,-0.55 0,0.55, body extent -1.07,-0.7 1.07,0.7, height 0.7
6-0805_N [mm] "Chip Resistor, Body 2.0x1.2mm, IPC Medium Density"
  rect 1.2x1.4 smd: 1(-0.9,0) 2(0.9,0)
  silkscreen extent 0,-0.6 0,0.6, body extent -1.07,-0.7 1.07,0.7, height 0.7
"0603 Resistor" [mm]
  rect 0.95x0.95 smd: 1(-0.725,0) 2(0.725,0)
1608[0603] [mm] "Chip Capacitor, Body 1.6x0.8mm, IPC High Density"
  rect 0.8x0.9 smd: 1(-0.7,0) 2(0.7,0)
  body extent -0.87,-0.48 0.87,0.48, height 1.3
"2997 11.6MM COIN CELL" [mm] "2997 11.6mm COIN CELL HOLDER KEYSTONE"
  round 2.5 hole 1.9: 1(-6.605,0) 1(6.605,0)
  rect 1.99x1.99 smd: 2(0,0)
  silkscreen extent -8.25,-6.03 8.25,6.03, body extent -8.25,-5.97 8.25,5.97, height 8.2
6410/2pin [mil]
  oct 75x75 hole 40: 1(0,0)
  round 75 hole 40: 2(100,0)
  silkscreen extent -50,-125 150,150, body extent -50,-114 150,114, height 461
6410/10pin [mil] "10-pin J4 Analog Input Connector"
  oct 75x75 hole 40: 1(0,0)
  round 75 hole 40: 2(100,0) 3(200,0) 4(300,0) 5(400,0) 6(500,0) 7(600,0) 8(700,0) 9(800,0) 10(900,0)
  silkscreen extent -50,-125 950,150, body extent -50,-114 950,114, height 461
BME280 [mm] "Bosch Humidity, Pressure Sensor"
  rect 0.6x0.35 smd mask+0.051: 1(1.075,0.975) 2(1.075,0.325) 3(1.075,-0.325) 4(1.075,-0.975) 5(-1.075,-0.975) 6(-1.075,-0.325) 7(-1.075,0.325) 8(-1.075,0.975)
  silkscreen extent -1.7,-1.4 1.7,1.9, body extent -1.25,-1.25 1.25,1.25, height 1
C1608[0603] [mm] "3DModel=0805.ogl"
  rect 0.9x0.95 smd: 1(-0.8,0) 2(0.8,0)
  body extent -0.8,-0.4 0.8,0.4, height 0.5
"C1608[0603] small" [mm] "3DModel=0805.ogl"
  rect 0.8x0.8 smd: 1(-0.8,0) 2(0.8,0)
  body extent -0.8,-0.4 0.8,0.4, height 0.5
C2012[0805] [mm] "3DModel=0805.ogl"
  rect 0.9x1.5 smd: 1(-0.95,0) 2(0.95,0)
  body extent -1.1,-0.7 1.1,0.7, height 0.9
C3225[1210]_Tall [mm]
  rect 1.1x2.7 smd: 1(-1.55,0) 2(1.55,0)
  body extent -1.6,-1.2 1.6,1.3, height 2.5
CAPC1005X06N [mm] "Chip Capacitor, 2-Leads, Body 1.00x0.50mm, IPC Medium Density"
  rect 0.64x0.64 smd: 1(-0.46,0) 2(0.46,0)
  body extent -0.55,-0.3 0.55,0.3, height 0.6
CONUFL001-SMD-T [mm] "uFL Connector"
  rect 1.05x2.2 smd: GND(-1.475,0.25) GND(1.475,0.25)
  rect 1x1.05 smd: SIG(0,-1.525)
  body extent -1.5,-1.55 1.5,1.55, height 1.25
FA-20H [mm] "40MHz Crystal"
  rect 1.2x1.1 smd: 1(-0.85,-0.7) 2(0.85,-0.7) 3(0.85,0.7) 4(-0.85,0.7)
INDC1608L [mm] "Chip Inductor, Body 1.6x0.8mm, IPC High Density"
  rect 0.8x0.9 smd: 1(-0.7,0) 2(0.7,0)
  silkscreen extent -1.4,-0.35 -1.4,0.35, body extent -0.87,-0.48 0.87,0.48, height 0.55
L1608[0603] [mm]
  rect 0.8x1 smd: 1(-0.8,0) 2(0.8,0)
  body extent -0.8,-0.4 0.8,0.4, height 0.8
L2012[0805] [mm]
  rect 0.9x1.5 smd: 1(-0.95,0) 2(0.95,0)
  body extent -1.1,-0.7 1.1,0.7, height 0.9
LED_0603 [mm]
  rect 0.8x0.8 smd: 1(-0.8,0) 2(0.8,0)
  silkscreen extent -1.4,-0.64 1.65,0.64, body extent -0.8,-0.4 0.8,0.4, height 0.55
MC-146 [mm] "32.768 kHz Crystal"
  rect 1.2x0.6 smd: 1(-3.15,-0.5) 2(3.15,-0.45) 3(3.15,0.45) 4(-3.15,0.45)
MI0805K400R-10 [mm] "Ferrite Bead"
  rect 1.47x1.285 smd: 1(0,0) 2(0,1.945)
"NXP PTVSxS1UR-Series (SOD123W)" [mm] "TVS Diode"
  rect 1x1.1 smd: 1(-1.55,0) 2(1.55,0)
  silkscreen extent -2,0.8 -1.9,0.9, body extent -1.4,-0.95 1.4,0.95, height 1.1
"PTS 815" [mm] "Small Surface Mount Button"
  rect 1x0.7 smd mask+0.051: 1(-2.25,1.075) 2(2.25,1.075) 3(-2.25,-1.075) 4(2.25,-1.075)
  silkscreen extent -2.41,-1.75 2.41,1.75, body extent -2.25,-1.6 2.25,1.6, height 2.5
QFN40P600X600X90_HS-49N [mm] "QFN, 48-Leads, Body 6.00x6.00mm, Pitch 0.40mm, Thermal Pad 4.30x4.30mm, IPC Medium Density"
  oval 0.85x0.2 smd: 1(-2.9,2.2) 2(-2.9,1.8) 3(-2.9,1.4) 4(-2.9,1) 5(-2.9,0.6) 6(-2.9,0.2) 7(-2.9,-0.2) 8(-2.9,-0.6) 9(-2.9,-1) 10(-2.9,-1.4) 11(-2.9,-1.8) 12(-2.9,-2.2) 25(2.9,-2.2) 26(2.9,-1.8) 27(2.9,-1.4) 28(2.9,-1) 29(2.9,-0.6) 30(2.9,-0.2) 31(2.9,0.2) 32(2.9,0.6) 33(2.9,1) 34(2.9,1.4) 35(2.9,1.8) 36(2.9,2.2)
  oval 0.2x0.85 smd: 13(-2.2,-2.9) 14(-1.8,-2.9) 15(-1.4,-2.9) 16(-1,-2.9) 17(-0.6,-2.9) 18(-0.2,-2.9) 19(0.2,-2.9) 20(0.6,-2.9) 21(1,-2.9) 22(1.4,-2.9) 23(1.8,-2.9) 24(2.2,-2.9) 37(2.2,2.9) 38(1.8,2.9) 39(1.4,2.9) 40(1,2.9) 41(0.6,2.9) 42(0.2,2.9) 43(-0.2,2.9) 44(-0.6,2.9) 45(-1,2.9) 46(-1.4,2.9) 47(-1.8,2.9) 48(-2.2,2.9)
  rect 4.3x4.3 smd: 49(0,0)
  silkscreen extent -3.95,-3.17 3.17,3.17, body extent -3.03,-3.03 3.03,3.03, height 0.9
R1608[0603] [mm]
  rect 0.8x1 smd: 1(-0.8,0) 2(0.8,0)
  body extent -0.8,-0.4 0.8,0.4, height 0.5
"R1608[0603] small" [mm]
  rect 0.8x0.8 smd: 1(-0.8,0) 2(0.8,0)
  body extent -0.8,-0.4 0.8,0.4, height 0.5
"Radial Can F61 6.6x6.6" [mm]
  rect 2x3 smd mask+0.051: 1(0,-2.5) 2(0,2.7)
  body extent -3.25,-3.25 3.25,3.25, height 6
"Radial Can Size G" [mm]
  rect 2x4.1 smd mask+0.051: 1(-0.025,-4.35) 2(0.025,4.35)
  body extent -5.18,-5.95 5.12,5.05, height 12.61
RESC1005X03N [mm] "Chip Resistor, 2-Leads, Body 1.00x0.50mm, IPC Medium Density"
  rect 0.55x0.55 smd: 1(-0.45,0) 2(0.45,0)
  body extent -0.53,-0.28 0.53,0.28, height 0.35
SD-47219-001 [mm] "Molex microSD Card Holder"
  rect 0.8x1.5 smd: 1(3.3,0) 2(2.2,0) 3(1.1,0) 4(0,0) 5(-1.1,0) 6(-2.2,0) 7(-3.3,0) 8(-4.4,0)
  rect 1.45x2 smd: 9(-6.78,-2.6) 10(-6.78,5.7) 11(6.97,5.7) 12(6.97,-2.6)
  body extent -7.05,-5.6 7.55,8.9, height 1.06
SIL0008D [mm] "TPS82140 Buck Converter"
  rect 0.5x0.4 smd: 1(-1.05,0.975) 2(-1.05,0.325) 3(-1.05,-0.325) 4(-1.05,-0.975) 5(1.05,-0.975) 6(1.05,-0.325) 7(1.05,0.325) 8(1.05,0.975)
  round 0.5 hole 0.3: 3(0,0.75) 3(0,0) 3(0,-0.75)
  rect 1.1x1.9 smd: 3(0,0)
  silkscreen extent -1.88,1.68 -1.68,1.88, body extent -1.45,-1.55 1.45,1.55, height 1.53
SOD-123FL_TVS [mm]
  rect 1.3x1.4 smd mask+0.051: 1(-1.45,0) 2(1.45,0)
  silkscreen extent 0.5,-0.65 0.5,0.65, body extent -1.5,-1 1.5,1, height 1
SODFL100X40-2N [mm] "SODFL, 2-Leads, Body 0.60x1.00mm, IPC Medium Density"
  rect 0.5x0.3 smd: 1(-0.5,0) 2(0.5,0)
  silkscreen extent -0.7,0.4 -0.6,0.5, body extent -0.42,-0.33 0.43,0.33, height 0.4
SOIC127P1030X265-16N [mm] "SOIC, 16-Leads, Body 10.30x7.50mm, Pitch 1.27mm, IPC Medium Density"
  oval 1.85x0.6 smd: 1(-4.675,4.445) 2(-4.675,3.175) 3(-4.675,1.905) 4(-4.675,0.635) 5(-4.675,-0.635) 6(-4.675,-1.905) 7(-4.675,-3.175) 8(-4.675,-4.445) 9(4.675,-4.445) 10(4.675,-3.175) 11(4.675,-1.905) 12(4.675,-0.635) 13(4.675,0.635) 14(4.675,1.905) 15(4.675,3.175) 16(4.675,4.445)
  silkscreen extent -4.8,-5.15 3.35,5.42, body extent -5.15,-5.15 5.15,5.15, height 2.65
SOIC-14 [mm]
  oct 1.25x0.75 smd: 1(-3.048,3.937)
  oval 1.25x0.75 smd: 2(-3.048,2.667) 3(-3.048,1.397) 4(-3.048,0.127) 5(-3.048,-1.143) 6(-3.048,-2.413) 7(-3.048,-3.683) 8(3.048,-3.683) 9(3.048,-2.413) 10(3.048,-1.143) 11(3.048,0.127) 12(3.048,1.397) 13(3.048,2.667) 14(3.048,3.937)
  silkscreen extent -1.91,-4.19 1.91,4.44, body extent -3.18,-4.19 3.18,4.44, height 1.52
"Solder Small 4 Pos" [mm]
  rect 1.5x2.5 smd mask+0.051: 1(-3,0) 2(-1,0) 3(1,0) 4(3,0)
SOP64P1030X175-20N [mm] "SOP, 20-Leads, Body 8.65x3.90mm, Pitch 0.64mm, IPC Medium Density"
  oval 2.35x0.45 smd: 1(-4.525,2.857) 2(-4.525,2.222) 3(-4.525,1.587) 4(-4.525,0.953) 5(-4.525,0.318) 6(-4.525,-0.318) 7(-4.525,-0.953) 8(-4.525,-1.587) 9(-4.525,-2.222) 10(-4.525,-2.857) 11(4.525,-2.857) 12(4.525,-2.222) 13(4.525,-1.587) 14(4.525,-0.953) 15(4.525,-0.318) 16(4.525,0.318) 17(4.525,0.953) 18(4.525,1.587) 19(4.525,2.222) 20(4.525,2.857)
  silkscreen extent -4.65,-4.35 2.95,4.35, body extent -5.15,-4.35 5.15,4.35, height 1.75
SOT65P210X110-6N [mm] "SOT23, 6-Leads, Body 2.00x2.10mm, Pitch 0.65mm, IPC Medium Density"
  rect 0.8x0.4 smd: 1(-1.075,0.65) 2(-1.075,0) 3(-1.075,-0.65) 4(1.075,-0.65) 5(1.075,0) 6(1.075,0.65)
  silkscreen extent -1.2,-1.1 0.3,1.52, body extent -1.1,-1.1 1.1,1.1, height 1.1
SOT230P700X165-4N [mm] "SOT223, 4-Leads, Body 6.50x7.00mm (avg), Pitch 2.30mm, IPC Medium Density"
  rect 1.9x0.9 smd: 1(-2.975,2.3) 2(-2.975,0) 3(-2.975,-2.3)
  rect 1.9x3.2 smd: 2(2.975,0)
  silkscreen extent -3.1,-3.3 1.75,3.42, body extent -3.5,-3.27 3.5,3.27, height 1.65
SWRA1117 [mm]
  rect 0.9x4.9 smd: 1(0,0)
  rect 5x0.5 smd: 1(2.05,2.7)
  rect 0.5x4.9 smd: 1(2.1,0)
  rect 0.5x2.64 smd: 1(4.3,1.13) 1(6.8,1.13) 1(9,1.13) 1(11.5,1.13)
  rect 2x0.5 smd: 1(5.55,0.06) 1(10.25,0.06)
  rect 2.7x0.5 smd: 1(7.9,2.7) 1(12.6,2.7)
  rect 0.5x3.94 smd: 1(13.7,0.5)
TP_SMD_39MIL [mil] "SMD Test Point"
  round 39 smd paste-23.62: 1(0,0)
TP_SMD_45MIL [mil] "SMD Test Point"
  round 45 smd paste-23.62: 1(0,0)
UJ2-MIBH2-4-SMT [mm] "USB MICRO-B Jack"
  oval 2x1.2 hole 0.6 slot 1.4 at 0 deg: 0(-1.55,2.2) 0(-1.55,-4.8)
  oval 1.2x1.05 hole 0.65 slot 0.8 at 0 deg: 0(0.4,0.925) 0(0.4,-3.525)
  rect 1.2x0.4 smd: 1(0,0) 2(0,-0.65) 3(0,-1.3) 4(0,-1.95) 5(0,-2.6)
  rect 0.9x3 smd: 9(-1.55,-1.3)
  silkscreen extent -4.95,-5.21 0.76,2.67, body extent -4.75,-5 0.55,2.5, height 0.81
VLMRGB6112 [mm]
  rect 0.8x0.55 smd mask+0.051: 1(1.4,-0.8) 2(1.4,0) 3(1.4,0.8) 4(-1.4,0.8) 5(-1.4,0) 6(-1.4,-0.8)
  silkscreen extent 1.94,-1.87 2.38,-1.43, body extent -1.6,-1.4 1.6,1.4, height 1.45
XA1100 [mm] "GPS Module"
  rect 2x0.6 smd: 1(-6.25,3) 2(-6.25,1.8) 3(-6.25,0.6) 4(-6.25,-0.6) 5(-6.25,-1.8) 6(-6.25,-3) 13(6.25,-3) 14(6.25,-1.8) 15(6.25,-0.6) 16(6.25,0.6) 17(6.25,1.8) 18(6.25,3)
  rect 0.6x2 smd: 7(-3.6,-6.25) 8(-2.4,-6.25) 9(-1.2,-6.25) 10(1.2,-6.25) 11(2.4,-6.25) 12(3.6,-6.25) 19(3.35,6.25) 20(2.15,6.25) 21(0.95,6.25) 22(-1.45,6.25) 23(-2.65,6.25) 24(-3.85,6.25)
  silkscreen extent -6.48,-6.48 6.48,6.48, body extent -6.25,-6.25 6.25,6.25, height 7

## Part data
B1 B2: "Push Button Top", Manufacturer="C&K Components", Manufacturer Part Number="PTS815 SJG 250 SMTR LFS", Supplier Part Number 1=CKN12217-1-ND, ComponentLink1Description=http://datasheet.octopart.com/PTS815-SJG-250-SMTR-LFS-C%26K-Components-datasheet-130077068.pdf?src-supplier=Allied+Electronics, ComponentLink1URL=http://datasheet.octopart.com/PTS815-SJG-250-SMTR-LFS-C%26K-Components-datasheet-130077068.pdf?src-supplier=Allied+Electronics, Stock 1=0, Supplier 1=Digi-Key
C1 C2 C3 C4 C5 C6 C7 C8: library part 100nF_0603_16V, "CAP 0.1µF 16V ±10% X7R 0603", Manufacturer=Samsung, Manufacturer Part Number=CL05B104KO5NNNC, Supplier Part Number 1=1276-1001-1-ND, Voltage=16V, ComponentLink1Description=http://www.murata.com/~/media/webrenewal/support/library/catalog/products/capacitor/mlcc/c03e.ashx, ComponentLink1URL=http://www.murata.com/~/media/webrenewal/support/library/catalog/products/capacitor/mlcc/c03e.ashx, ComponentLink2Description=https://www.arrow.com/en/products/gcm188r71c104ka37d/murata-manufacturing/, ComponentLink2URL=https://www.arrow.com/en/products/gcm188r71c104ka37d/murata-manufacturing/, Supplier 1=Digi-Key
C9 C10: "Capacitor", Manufacturer=Samsung, Manufacturer Part Number=CL05C271JB5NNNC, Voltage=50V
C11 C12: "Capacitor", Voltage=6V3
C13 C14 C15 C16 C44 C46: "Capacitor"
  C44: LatestRevisionDate=17-Jul-2002, LatestRevisionNote="Re-released for DXP Platform.", PackageDescription="Radial Cap, Thru-Hole; 2 Leads; 0.3 in Pin Spacing", PackageReference=RAD-0.3, Published=8-Jun-2000, Publisher="Altium Limited", Supplier Link=490-11257-1-ND
  C46: LatestRevisionDate=17-Jul-2002, LatestRevisionNote="Re-released for DXP Platform.", PackageDescription="Radial Cap, Thru-Hole; 2 Leads; 0.3 in Pin Spacing", PackageReference=RAD-0.3, Published=8-Jun-2000, Publisher="Altium Limited", Supplier Link=490-7162-1-ND
C17 C18 C22 C25 C26 C29: library part 4.7uF_0603_10V, "CAP 4.7uF 10V ±10% X5R 0603", Manufacturer=Samsung, Manufacturer Part Number=CL05A475MP5NRNC, Voltage=10V, ComponentLink1Description=http://www.murata.com/~/media/webrenewal/support/library/catalog/products/capacitor/mlcc/c02e.pdf, ComponentLink1URL=http://www.murata.com/~/media/webrenewal/support/library/catalog/products/capacitor/mlcc/c02e.pdf
C19: library part "22uF 50V Hybrid Polymer Capacitor", "22uF 50V Hybrid Polymer Capacitor", Capacitance=22µF, ESR (Equivalent Series Resistance)="80 mOhm", Lifetime @ Temp.="5000 Hrs @ 105°C", Manufacturer="United Chemi-Con", Manufacturer Part Number=HHXB500ARA220MF61G, Operating Temperature="-55°C ~ 105°C", Package / Case="Radial, Can - SMD", Ripple Current=1.1A, Standard Package=1, Supplier Part Number 1=565-4188-6-ND, Tolerance=±20%, Voltage Rating=50V, Applications="General Purpose", Category=Capacitors, ComponentLink1Description=http://www.mouser.com/ds/2/420/al-hxb-bulletin831e-e-140325-345764.pdf, ComponentLink1URL=http://www.mouser.com/ds/2/420/al-hxb-bulletin831e-e-140325-345764.pdf, ComponentLink2Description=//media.digikey.com/pdf/Data%20Sheets/United%20Chemi-Con%20PDFs/HXB_Series_Bltn.pdf, ComponentLink2URL=//media.digikey.com/pdf/Data%20Sheets/United%20Chemi-Con%20PDFs/HXB_Series_Bltn.pdf, Digikey PN=565-4188-1-ND, Family="Aluminum - Polymer Capacitors", Featured Product="Hybrid Polymer Aluminum Electrolytic Capacitors HXB Series", Height - Seated (Max)="0.240\" (6.10mm)", Impedance=-, Lead Spacing=-, Mounting Type="Surface Mount", Online Catalog="HXB Series", Other Names=565-4188-1, Packaging="Cut Tape (CT)", Polarization=Polar, Pricing 1="1=1.32, 10=1.043, 100=0.7825, 500=0.5912 (USD)", Series="Automotive, AEC-Q200, HXB, Hybrid", Size / Dimension="0.248\" Dia (6.30mm)", Stock 1=1047, Supplier 1=Digikey, Surface Mount Land Size="0.260\" L x 0.260\" W (6.60mm x 6.60mm)"
C20: library part 22uF_0805_16V, "CAP 22µF 16V ±20% X5R 0805", Capacitance=22µF, Manufacturer="Samsung Electro-Mechanics", Manufacturer Part Number=CL21A226MOCLRNC, Operating Temperature="-55°C ~ 85°C", Package / Case="0805 (2012 Metric)", Ratings=-, Supplier Part Number 1=1276-6780-1-ND, Temperature Coefficient=X5R, Tolerance=±20%, Voltage - Rated=16V, Applications="General Purpose", Category=Capacitors, Family="Ceramic Capacitors", Features="Low Profile", Height - Seated (Max)=-, Lead Spacing=-, Lead Style=-, Mounting Type="Surface Mount, MLCC", Packaging="Tape &amp; Reel (TR)", Pricing 1="1=0.26, 10=0.176, 100=0.0996, 500=0.0703, 1000=0.0615 (USD)", Series=CL, Size / Dimension="0.079\" L x 0.049\" W (2.00mm x 1.25mm)", Stock 1=250082, Supplier 1=Digi-Key, Thickness (Max)="0.037\" (0.95mm)", TZOA PN=211-00008
C21 C30 C41: library part 100nF_0603_16V, "CAP 0.1µF 16V ±10% X7R 0603", Manufacturer="Murata Electronics North America", Manufacturer Part Number=GCM188R71C104KA37D, Operating Temperature="-55°C ~ 125°C", Package / Case="0603 (1608 Metric)", Package Quantity=4000, Ratings=AEC-Q200, Supplier Part Number 1=490-4774-1-ND, Temperature Coefficient=X7R, Tolerance=±10%, Voltage - Rated=16V, Applications=Automotive, Capacitance=100nF, Category=Capacitors, ComponentLink1Description=http://www.murata.com/~/media/webrenewal/support/library/catalog/products/capacitor/mlcc/c03e.ashx, ComponentLink1URL=http://www.murata.com/~/media/webrenewal/support/library/catalog/products/capacitor/mlcc/c03e.ashx, ComponentLink2Description=https://www.arrow.com/en/products/gcm188r71c104ka37d/murata-manufacturing/, ComponentLink2URL=https://www.arrow.com/en/products/gcm188r71c104ka37d/murata-manufacturing/, Features=-, Height - Seated (Max)=-, ID=2203580, Lead Spacing=-, Lead Style=-, Mounting Type="Surface Mount, MLCC", Packaging="Cut Tape (CT)", Pricing 1="1=0.14, 10=0.052, 50=0.0284, 100=0.0241, 250=0.01968, 500=0.01684, 1000=0.01312 (CAD)", Pricing 2="16000000=0.0076, 128000000=0.0067 (USD)", RoHS="RoHS Compliant", Size / Dimension="0.063\" L x 0.031\" W (1.60mm x 0.80mm)", Stock 1=39308, Stock 2=2052000, Supplier 1=Digi-Key, Supplier 2=Arrow, Supplier Part Number 2=oUsDppRPnR_xp85jY4QXp563pihAbtOBn9HlK9MW6OUj_bvwNKbpFri4ovQvvkAO, Thickness (Max)="0.035\" (0.90mm)", TZOA PN=211-00002
  C21: Digikey PN=490-4774-1-ND
C23 C31: library part 15nF_0603_50V, "Cap,SMD,15nF,0603,50V,X7R,10%", Capacitance=10000pF, Manufacturer="Samsung Electro-Mechanics America, Inc.", Manufacturer Part Number=CL10B153KB8NNNC, Operating Temperature="-55°C ~ 125°C", Package / Case="0603 (1608 Metric)", Package Quantity=4000, Ratings=-, Supplier Part Number 1=1276-1277-1-ND, Temperature Coefficient=X7R, Tolerance=±10%, Voltage - Rated=50V, Applications="General Purpose", Category=Capacitors, ComponentLink1Description=http://www.samsungsem.com/kr/support/product-search/mlcc/CL10B103KB8NNNC.jsp, ComponentLink1URL=http://www.samsungsem.com/kr/support/product-search/mlcc/CL10B103KB8NNNC.jsp, ComponentLink2Description=https://www.arrow.com/en/products/cl10b103kb8nnnc/samsung-electro-mechanics/, ComponentLink2URL=https://www.arrow.com/en/products/cl10b103kb8nnnc/samsung-electro-mechanics/, Features=-, Height - Seated (Max)=-, ID=1634634, Lead Spacing=-, Lead Style=-, Mounting Type="Surface Mount, MLCC", Packaging="Cut Tape (CT)", Pricing="1=0.14, 10=0.024, 25=0.0168, 50=0.013, 100=0.011, 500=0.00764, 1000=0.00597 (CAD)", RoHS="RoHS Compliant", Size / Dimension="0.063\" L x 0.031\" W (1.60mm x 0.80mm)", Stock=420353, Supplier 1=Digi-Key, Supplier 2=Arrow, Supplier Part Number 2=Kjzk4c3iaGHKgu91OSCceftLzGdEy-eHvzd4Lw8V1m4ZVywxIBNyoAQstvnyfZZ0, Thickness (Max)="0.035\" (0.90mm)"
  C23: Digikey PN=1276-1277-1-ND
C24: library part 3.3nF_0603_?V, Supplier Part Number 1=445-14141-1-ND
C27: Capacitance="100 uF", Case Diameter="10 mm", Case Height="10.5 mm", Case Length="10.2 mm", Manufacturer=Panasonic, Manufacturer Part Number=EEH-ZA1H101P, Maximum Operating Temperature="+ 105 C", Minimum Operating Temperature="- 55 C", Ripple Current="2 A", Supplier Part Number 1=P15442CT-ND, Tolerance="20 %", Voltage Rating DC="50 V", Brand=Panasonic, ComponentLink1Description=https://datasheet.ciiva.com/48541/eehza-eng-tds-48541031.pdf, ComponentLink1URL=https://datasheet.ciiva.com/48541/eehza-eng-tds-48541031.pdf, ComponentLink2Description=https://datasheet.ciiva.com/18524/aba0000ce136-18524922.pdf, ComponentLink2URL=https://datasheet.ciiva.com/18524/aba0000ce136-18524922.pdf, ComponentLink3Description=https://datasheet.ciiva.com/6134/1536543-6134363.pdf, ComponentLink3URL=https://datasheet.ciiva.com/6134/1536543-6134363.pdf, ComponentLink4Description=https://datasheet.ciiva.com/7794/1536543-7794235.pdf, ComponentLink4URL=https://datasheet.ciiva.com/7794/1536543-7794235.pdf, ComponentLink5Description=https://datasheet.ciiva.com/18524/aba0000ce136-18524923.pdf, ComponentLink5URL=https://datasheet.ciiva.com/18524/aba0000ce136-18524923.pdf, ComponentLink6Description=https://datasheet.ciiva.com/30178/86aba0000ce136-30178699.pdf, ComponentLink6URL=https://datasheet.ciiva.com/30178/86aba0000ce136-30178699.pdf, ComponentLink7Description=https://datasheet.ciiva.com/14595/70256916-14595260.pdf, ComponentLink7URL=https://datasheet.ciiva.com/14595/70256916-14595260.pdf, ComponentLink8Description=https://datasheet.ciiva.com/18524/aba0000ce136-18524924.pdf, ComponentLink8URL=https://datasheet.ciiva.com/18524/aba0000ce136-18524924.pdf, ComponentLink9Description=https://datasheet.ciiva.com/28691/1536543-28691421.pdf, ComponentLink9URL=https://datasheet.ciiva.com/28691/1536543-28691421.pdf, ComponentLink10Description=https://datasheet.ciiva.com/22730/1536543-22730558.pdf, ComponentLink10URL=https://datasheet.ciiva.com/22730/1536543-22730558.pdf, ComponentLink11Description=https://datasheet.ciiva.com/10327/aba0000ce136-10327231.pdf, ComponentLink11URL=https://datasheet.ciiva.com/10327/aba0000ce136-10327231.pdf, ESR="28 mOhms", Factory Pack Quantity=500, Height="10.5 mm", Load Life="10000 Hour", Packaging=Reel, Pricing 1="1=3.3, 10=2.734, 25=2.6136, 50=2.5332, 100=2.4125, 250=2.2517 (USD)", Product="Aluminum Electrolytic Capacitors", Product Category="Aluminum Organic Polymer Capacitors", RoHS=Details, Series=ZA, Stock 1=9616, Supplier 1=Digikey, Termination Style=SMD/SMT
C28: library part 100uF_1210_10V, "Cap,SMD,100uF,1210,10V,X5R,20%", Capacitance="100 uF", Case Code - in=1210, Case Code - mm=3225, Dielectric=X5R, Manufacturer=Murata, Manufacturer Part Number=GRM32ER61A107ME20L, Maximum Operating Temperature="+ 85 C", Minimum Operating Temperature="- 55 C", Package / Case="1210 (3225 metric)", Supplier Part Number 1=490-9969-1-ND, Tolerance="20 %", Voltage Rating DC="10 VDC", Brand="Murata Electronics", ComponentLink1Description=http://components.arrow.com/part/dataview/0323_06932945, ComponentLink1URL=http://components.arrow.com/part/dataview/0323_06932945, ComponentLink2Description=http://www.mouser.com/ds/2/281/c02e-2905.pdf, ComponentLink2URL=http://www.mouser.com/ds/2/281/c02e-2905.pdf, ComponentLink3Description=http://www.farnell.com/datasheets/2079200.pdf, ComponentLink3URL=http://www.farnell.com/datasheets/2079200.pdf, ComponentLink4Description=http://psearch.en.murata.com/capacitor/product/GRM32ER61A107ME20%23.pdf, ComponentLink4URL=http://psearch.en.murata.com/capacitor/product/GRM32ER61A107ME20%23.pdf, Factory Pack Quantity=1000, Height="2.5 mm", Length="3.2 mm", Packaging="Cut Tape (CT)", Pricing 1="1=1.08, 10=0.822, 100=0.5882, 500=0.4554 (USD)", Product="General Type MLCCs", Product Category="Multilayer Ceramic Capacitors MLCC - SMD/SMT", RoHS=True, Series=GRM, Stock 1=102719, Supplier 1=Digi-Key, Termination Style=SMD/SMT, Type="Voltage and Temperature Derating Recommended Product", TZOA PN=211-, Unit Weight="0.003880 oz", Width="2.5 mm"
C32: library part 4.7uF_0603_10V, "CAP 4.7uF 10V ±10% X5R 0603", Capacitance=4.7µF, Manufacturer="Taiyo Yuden", Manufacturer Part Number=LMK107BJ475KA-T, Voltage - Rated=10V, ComponentLink1Description=http://www.murata.com/~/media/webrenewal/support/library/catalog/products/capacitor/mlcc/c02e.pdf, ComponentLink1URL=http://www.murata.com/~/media/webrenewal/support/library/catalog/products/capacitor/mlcc/c02e.pdf
C33: library part 100nF_0603_16V, "CAP 0.1µF 16V ±10% X7R 0603", Manufacturer="Murata Electronics North America", Manufacturer Part Number=GCM188R71C104KA37D, Voltage - Rated=16V, Capacitance=100nF, ComponentLink1Description=http://www.murata.com/~/media/webrenewal/support/library/catalog/products/capacitor/mlcc/c03e.ashx, ComponentLink1URL=http://www.murata.com/~/media/webrenewal/support/library/catalog/products/capacitor/mlcc/c03e.ashx, ComponentLink2Description=https://www.arrow.com/en/products/gcm188r71c104ka37d/murata-manufacturing/, ComponentLink2URL=https://www.arrow.com/en/products/gcm188r71c104ka37d/murata-manufacturing/
C34 C35: library part 100pF_0603_?V, Manufacturer=Yageo, Manufacturer Part Number=CC0402JRNPO9BN470, Voltage=50V
C36: library part 100pF_0603_?V, Manufacturer=Yageo, Manufacturer Part Number=CC0603JRNPO9BN101, Voltage=50V
C37 C38 C40 C52: library part 1uF_0603_25V, "CAP 1µF 25V ±10% X7R 0603", Capacitance="1 µF", Case Size/Dimension=0603, Dielectric=X7R, Manufacturer=Samsung, Manufacturer Part Number=CL10B105KA8NNNC, Rated Voltage="25 V", Supplier Part Number 1=1276-1184-1-ND, Tolerance (%)="±10 %", ComponentLink1Description=https://datasheet.ciiva.com/16449/cl10b105ka8nnnc-16449544.pdf, ComponentLink1URL=https://datasheet.ciiva.com/16449/cl10b105ka8nnnc-16449544.pdf, ComponentLink2Description=https://datasheet.ciiva.com/15195/getdatasheetpartid-359554-15195726.pdf, ComponentLink2URL=https://datasheet.ciiva.com/15195/getdatasheetpartid-359554-15195726.pdf, Pricing 1="1=0.1, 10=0.069, 100=0.0307, 500=0.0219, 1000=0.0172 (USD)", Stock 1=622934, Supplier 1=Digi-Key, TZOA PN=211-00001
C39 C42: library part 100pF_0603_?V
C43 C56: library part 100nF_0603_16V, "CAP 0.1µF 16V ±10% X7R 0603", Manufacturer="Murata Electronics North America", Manufacturer Part Number=GCM188R71C104KA37D, Operating Temperature="-55°C ~ 125°C", Package / Case="0603 (1608 Metric)", Package Quantity=4000, Ratings=AEC-Q200, Supplier Part Number 1=490-4774-1-ND, Temperature Coefficient=X7R, Tolerance=±10%, Voltage=16V, Applications=Automotive, Capacitance=100nF, Category=Capacitors, ComponentLink1Description=http://www.murata.com/~/media/webrenewal/support/library/catalog/products/capacitor/mlcc/c03e.ashx, ComponentLink1URL=http://www.murata.com/~/media/webrenewal/support/library/catalog/products/capacitor/mlcc/c03e.ashx, ComponentLink2Description=https://www.arrow.com/en/products/gcm188r71c104ka37d/murata-manufacturing/, ComponentLink2URL=https://www.arrow.com/en/products/gcm188r71c104ka37d/murata-manufacturing/, Features=-, Height - Seated (Max)=-, ID=2203580, Lead Spacing=-, Lead Style=-, Mounting Type="Surface Mount, MLCC", Packaging="Cut Tape (CT)", Pricing 1="1=0.14, 10=0.052, 50=0.0284, 100=0.0241, 250=0.01968, 500=0.01684, 1000=0.01312 (CAD)", Pricing 2="16000000=0.0076, 128000000=0.0067 (USD)", RoHS="RoHS Compliant", Size / Dimension="0.063\" L x 0.031\" W (1.60mm x 0.80mm)", Stock 1=39308, Stock 2=2052000, Supplier 1=Digi-Key, Supplier 2=Arrow, Supplier Part Number 2=oUsDppRPnR_xp85jY4QXp563pihAbtOBn9HlK9MW6OUj_bvwNKbpFri4ovQvvkAO, Thickness (Max)="0.035\" (0.90mm)", TZOA PN=211-00002, Voltage - Rated=16V
C45 C47 C49 C50: "Capacitor", Manufacturer=Samsung, Manufacturer Part Number=CL05B104KO5NNNC, Voltage=16V
C48: "Capacitor", Manufacturer=Samsung, Manufacturer Part Number=CL05A106MP5NUNC, Voltage=10V
C53 C54: library part 100nF_0603_16V, "CAP 0.1µF 16V ±10% X7R 0603", Manufacturer=Samsung, Manufacturer Part Number=CL05B104KO5NNNC, Voltage=16V, ComponentLink1Description=http://www.murata.com/~/media/webrenewal/support/library/catalog/products/capacitor/mlcc/c03e.ashx, ComponentLink1URL=http://www.murata.com/~/media/webrenewal/support/library/catalog/products/capacitor/mlcc/c03e.ashx, ComponentLink2Description=https://www.arrow.com/en/products/gcm188r71c104ka37d/murata-manufacturing/, ComponentLink2URL=https://www.arrow.com/en/products/gcm188r71c104ka37d/murata-manufacturing/
C55: library part 1uF_0603_25V, "CAP 1µF 25V ±10% X7R 0603", Capacitance="1 µF", Case Size/Dimension=0603, Dielectric=X7R, Manufacturer=Samsung, Manufacturer Part Number=CL10B105KA8NNNC, Supplier Part Number 1=1276-1184-1-ND, Tolerance (%)="±10 %", Voltage="25 V", ComponentLink1Description=https://datasheet.ciiva.com/16449/cl10b105ka8nnnc-16449544.pdf, ComponentLink1URL=https://datasheet.ciiva.com/16449/cl10b105ka8nnnc-16449544.pdf, ComponentLink2Description=https://datasheet.ciiva.com/15195/getdatasheetpartid-359554-15195726.pdf, ComponentLink2URL=https://datasheet.ciiva.com/15195/getdatasheetpartid-359554-15195726.pdf, Pricing 1="1=0.1, 10=0.069, 100=0.0307, 500=0.0219, 1000=0.0172 (USD)", Stock 1=622934, Supplier 1=Digi-Key, TZOA PN=211-00001
D1: "LED RGB Clear 624nm/526nm/469nm 2V/3.1V/3V PLCC-6", Manufacturer="Vishay Semiconductor Opto Division", Manufacturer Part Number=VLMRGB6112-00-GS08, Supplier Part Number 1=VLMRGB6112-00-GS08CT-ND, Supplier 1=Digi-Key, TZOA PN=250-00002
D2: "Typical RED, GREEN, YELLOW, AMBER GaAs LED", LatestRevisionDate=17-Jul-2002, LatestRevisionNote="Re-released for DXP Platform.", PackageDescription="SM LED; 2 Flat Leads", PackageReference=3.2X1.6X1.1, PackageVersion=Feb-2002, Published=8-Jun-2000, Publisher="Altium Limited"
D3 D4 D5 D6: library part "Green LED", "LED Green Diffused 0603", Color=Green, Forward (Drive) Current="20 mA", Forward Voltage="2.2 V", Manufacturer=Rohm, Manufacturer Part Number=SML-D12M8WT86, Supplier Part Number 1=511-1578-1-ND, ComponentLink1Description=https://datasheet.ciiva.com/11774/0900766b80df3ada-11774260.pdf, ComponentLink1URL=https://datasheet.ciiva.com/11774/0900766b80df3ada-11774260.pdf, ComponentLink2Description=https://datasheet.ciiva.com/3161/sml-d1-3161419.pdf, ComponentLink2URL=https://datasheet.ciiva.com/3161/sml-d1-3161419.pdf, ComponentLink3Description=https://datasheet.ciiva.com/2110/sml-d1-2110396.pdf, ComponentLink3URL=https://datasheet.ciiva.com/2110/sml-d1-2110396.pdf, ComponentLink4Description=https://datasheet.ciiva.com/2110/sml-d1-2110397.pdf, ComponentLink4URL=https://datasheet.ciiva.com/2110/sml-d1-2110397.pdf, ComponentLink5Description=https://datasheet.ciiva.com/2110/sml-d1-2110398.pdf, ComponentLink5URL=https://datasheet.ciiva.com/2110/sml-d1-2110398.pdf, Digikey PN=511-1578-1-ND, Dimension=0603, Intensity="100 mcd", Lens Type=Diffused, Pricing 1="1=0.34, 10=0.251, 25=0.1848, 100=0.132, 250=0.0898, 500=0.0792, 1000=0.062 (USD)", Stock 1=105158, Supplier 1=Digi-Key, TZOA PN=XXX
D7 D8 D11 D12 D13 D14 D15 D16: library part ESD7951S, "TVS Diode", Manufacturer="ON Semiconductor", Manufacturer Part Number=ESD7951ST5G, Supplier Link=ESD7951ST5GOSCT-ND
D9: library part "Diode 300mA Gen Purp", "300mA General Purpose", Manufacturer="Diodes Incorporated", Manufacturer Part Number=1N4148W-7-F, Supplier 1=Digi-Key, Supplier Part Number 1=1N4148W-FDICT-ND
D10: library part "Diode 300mA Gen Purp"
D17 D18 D19 D20 D21 D22 D23 D24: library part "NXP PTVSxS1UR-Series", Manufacturer=Nexperia, Manufacturer Part Numer=PTVS5V0S1UR,115, Supplier Part Number 1=1727-5229-1-ND, Supplier 1=Digi-Key
D25: library part "NXP PTVSxS1UR-Series", Manufacturer=Nexperia, Manufacturer Part Number=PTVS5V0S1UR,115, Supplier Part Number 1=1727-5229-1-ND, Supplier 1=Digi-Key
D26 D27 D28 D29 D30 D31 D32: library part "NXP PTVSxS1UR-Series", Manufacturer=Nexperia, Manufacturer Part Number=PTVS3V3S1UTR,115, Supplier Part Number 1=1727-1416-1-ND, Supplier 1=Digi-Key
D33 D35: library part "NXP PTVSxS1UR-Series", Supplier Part Number 1=1727-1416-1-ND, Supplier 1=Digi-Key
D34: library part "NXP PTVSxS1UR-Series", Manufacturer=Nexperia, Manufacturer Part Number=PTVS12VS1UR,115, Supplier Part Number 1=1727-5325-1-ND, Supplier 1=Digi-Key
E1: "Generic Antenna", LatestRevisionDate=17-Jul-2002, LatestRevisionNote="Re-released for DXP Platform.", PackageReference=PIN1, Published=24-Mar-1999, Publisher="Altium Limited"
FB1: "MI0805K400R-10", Manufacturer=Laird, Supplier Part Number 1=240-2389-1-ND, Manufacturer Part Number=MI0805K400R-10
J1: library part CON10, "Connector  Phoenix 10 pin", Manufacturer=Molex, Manufacturer Part Number=0022232101
J2: library part CON2, "Connector 2 pin", Supplier Part Number 1=WM19468-ND
J3: library part "TERM BLOCK 2POS 45DEG 5.08MM", "5.08mm Spring Cage, Tension Clamp, Pheonix Contact, 2pos, THD", Manufacturer="Phoenix Contact", Supplier Part Number 1=277-6722-ND, Manufacturer Part Number=1790283
J4: library part "3POS PHOENIX 1985205", "3POS,THD,TENSION CLAMP,PHOENIX CONTACT"
J6: library part "30mm Coin Cell Holder", "DigiKey # 36-2997-ND", Manufacturer="Keystone Electronics", Manufacturer Part Number=2997, Supplier Part Number 1=36-2997-ND, Supplier 1=Digi-Key
J7: library part "uFl Connector", "CONUFL001-SMD-T", Supplier Part Number 1=CONUFL001-SMD-TCT-ND, Supplier Link=CONUFL001-SMD-TCT-ND
J8: library part "MOLEX HEADER 9", "0.100\" Female Header", Manufacturer=Sullins, Supplier Part Number 1=S7042-ND, Manufacturer Part Number=PPPC091LFBN-RC, Supplier 1=Digi-Key
J9: library part CON12, Manufacturer=Molex, Manufacturer Part Number=0472192001, Supplier Part Number 1=WM6698CT-ND
L1 L2: library part Ferrite_MH2029_0805, "Ferrite,SMD,3A,30Ohm,0805", Current Rating (Max)=3A, DC Resistance (DCR) (Max)="25 mOhm", Impedance @ Frequency="30 Ohm @ 100MHz", Manufacturer="Bourns Inc.", Manufacturer Part Number=MH2029-300Y, Operating Temperature="-55°C ~ 125°C", Package / Case="0805 (2012 Metric)", Package Quantity=1, Ratings=-, Supplier Part Number 1=MH2029-300YCT-ND, Category=Filters, ComponentLink1Description=http://www.bourns.com/docs/Product-Datasheets/mh.pdf, ComponentLink1URL=http://www.bourns.com/docs/Product-Datasheets/mh.pdf, ComponentLink2Description=https://www.arrow.com/en/products/mh2029-300y/bourns/, ComponentLink2URL=https://www.arrow.com/en/products/mh2029-300y/bourns/, Filter Type="Power, Signal Line", Height (Max)="0.043\" (1.10mm)", ID=1851582, Mounting Type="Surface Mount", Number of Lines=1, Packaging="Cut Tape (CT)", Pricing="1=0.14, 10=0.087, 25=0.08, 50=0.072, 100=0.0529, 250=0.03844, 500=0.03524, 1000=0.03043 (CAD)", RoHS="RoHS Compliant", Size / Dimension="0.079\" L x 0.047\" W (2.00mm x 1.20mm)", Stock=27744, Supplier 1=Digi-Key, Supplier 2=Arrow, Supplier Part Number 2=m2dWQtYZmUCQVruAmfTV4mDHm8tZpH9KPPdphe4ib-E
L4: library part Ferrite_600Ohm@100MHz, "Ferrite Bead, 600Ohm @ 100MHz, 200mA IDC, Power Line, 0603", Manufacturer=Murata, Manufacturer Part Number=BLM18BD601BH1D, Supplier Part Number 1=490-14052-1-ND, Supplier 1=Digi-Key
L5: library part Inductor_33nH, "Fixed Inductor,SMD,33nH,550mA,132mOhmDCR,2.5GHz,0603", Manufacturer=Murata, Manufacturer Part Number=LQW18AN33NJ10D, Supplier Part Number 1=490-6885-1-ND, Supplier 1=Digi-Key
R1 R3 R5 R7 R13 R15 R17 R19: library part 1K00_0603_0.1W, "RES 1K Ohm ±5%, 0.25W,1/4W 0603", Manufacturer=Panasonic, Manufacturer Part Number=ERJ-2RKF1001X, Supplier Part Number 1=P1.00KLCT-ND, ComponentLink1Description=https://datasheet.ciiva.com/2469/esr-2469603.pdf, ComponentLink1URL=https://datasheet.ciiva.com/2469/esr-2469603.pdf, ComponentLink2Description=https://datasheet.ciiva.com/2469/esr-2469604.pdf, ComponentLink2URL=https://datasheet.ciiva.com/2469/esr-2469604.pdf, ComponentLink3Description=https://datasheet.ciiva.com/2469/esr-2469605.pdf, ComponentLink3URL=https://datasheet.ciiva.com/2469/esr-2469605.pdf, Supplier 1=Digi-Key
R2 R4 R6 R8 R14 R16 R18 R20: library part 4R99_0603_1/4W, "Res,SMD,4R99,1/4W,5%", Manufacturer=Stackpole, Manufacturer Part Number=RMCF0402FT4R99, Supplier Part Number 1=RMCF0402FT4R99CT-ND, Supplier 1=Digi-Key
R9 R10 R11 R12 R21 R22 R23 R24: library part 22K_0603_1/4W, "Res,SMD,22k,0603,5%,1/4W", Manufacturer=Panasonic, Manufacturer Part Number=ERJ-2RKF2202X, Supplier Part Number 1=P22.0KLDKR-ND, Supplier 1=Digi-Key
R25: library part Res1, "Resistor", Manufacturer=Panasonic, Manufacturer Part Number=ERJ-3EKF2002V, Supplier Part Number 1=P20.0KHCT-ND
R26: library part Res1, "Resistor", Supplier Part Number 1=P499HCT-ND